# Allegro board pc049a_lemo_db_06.brd
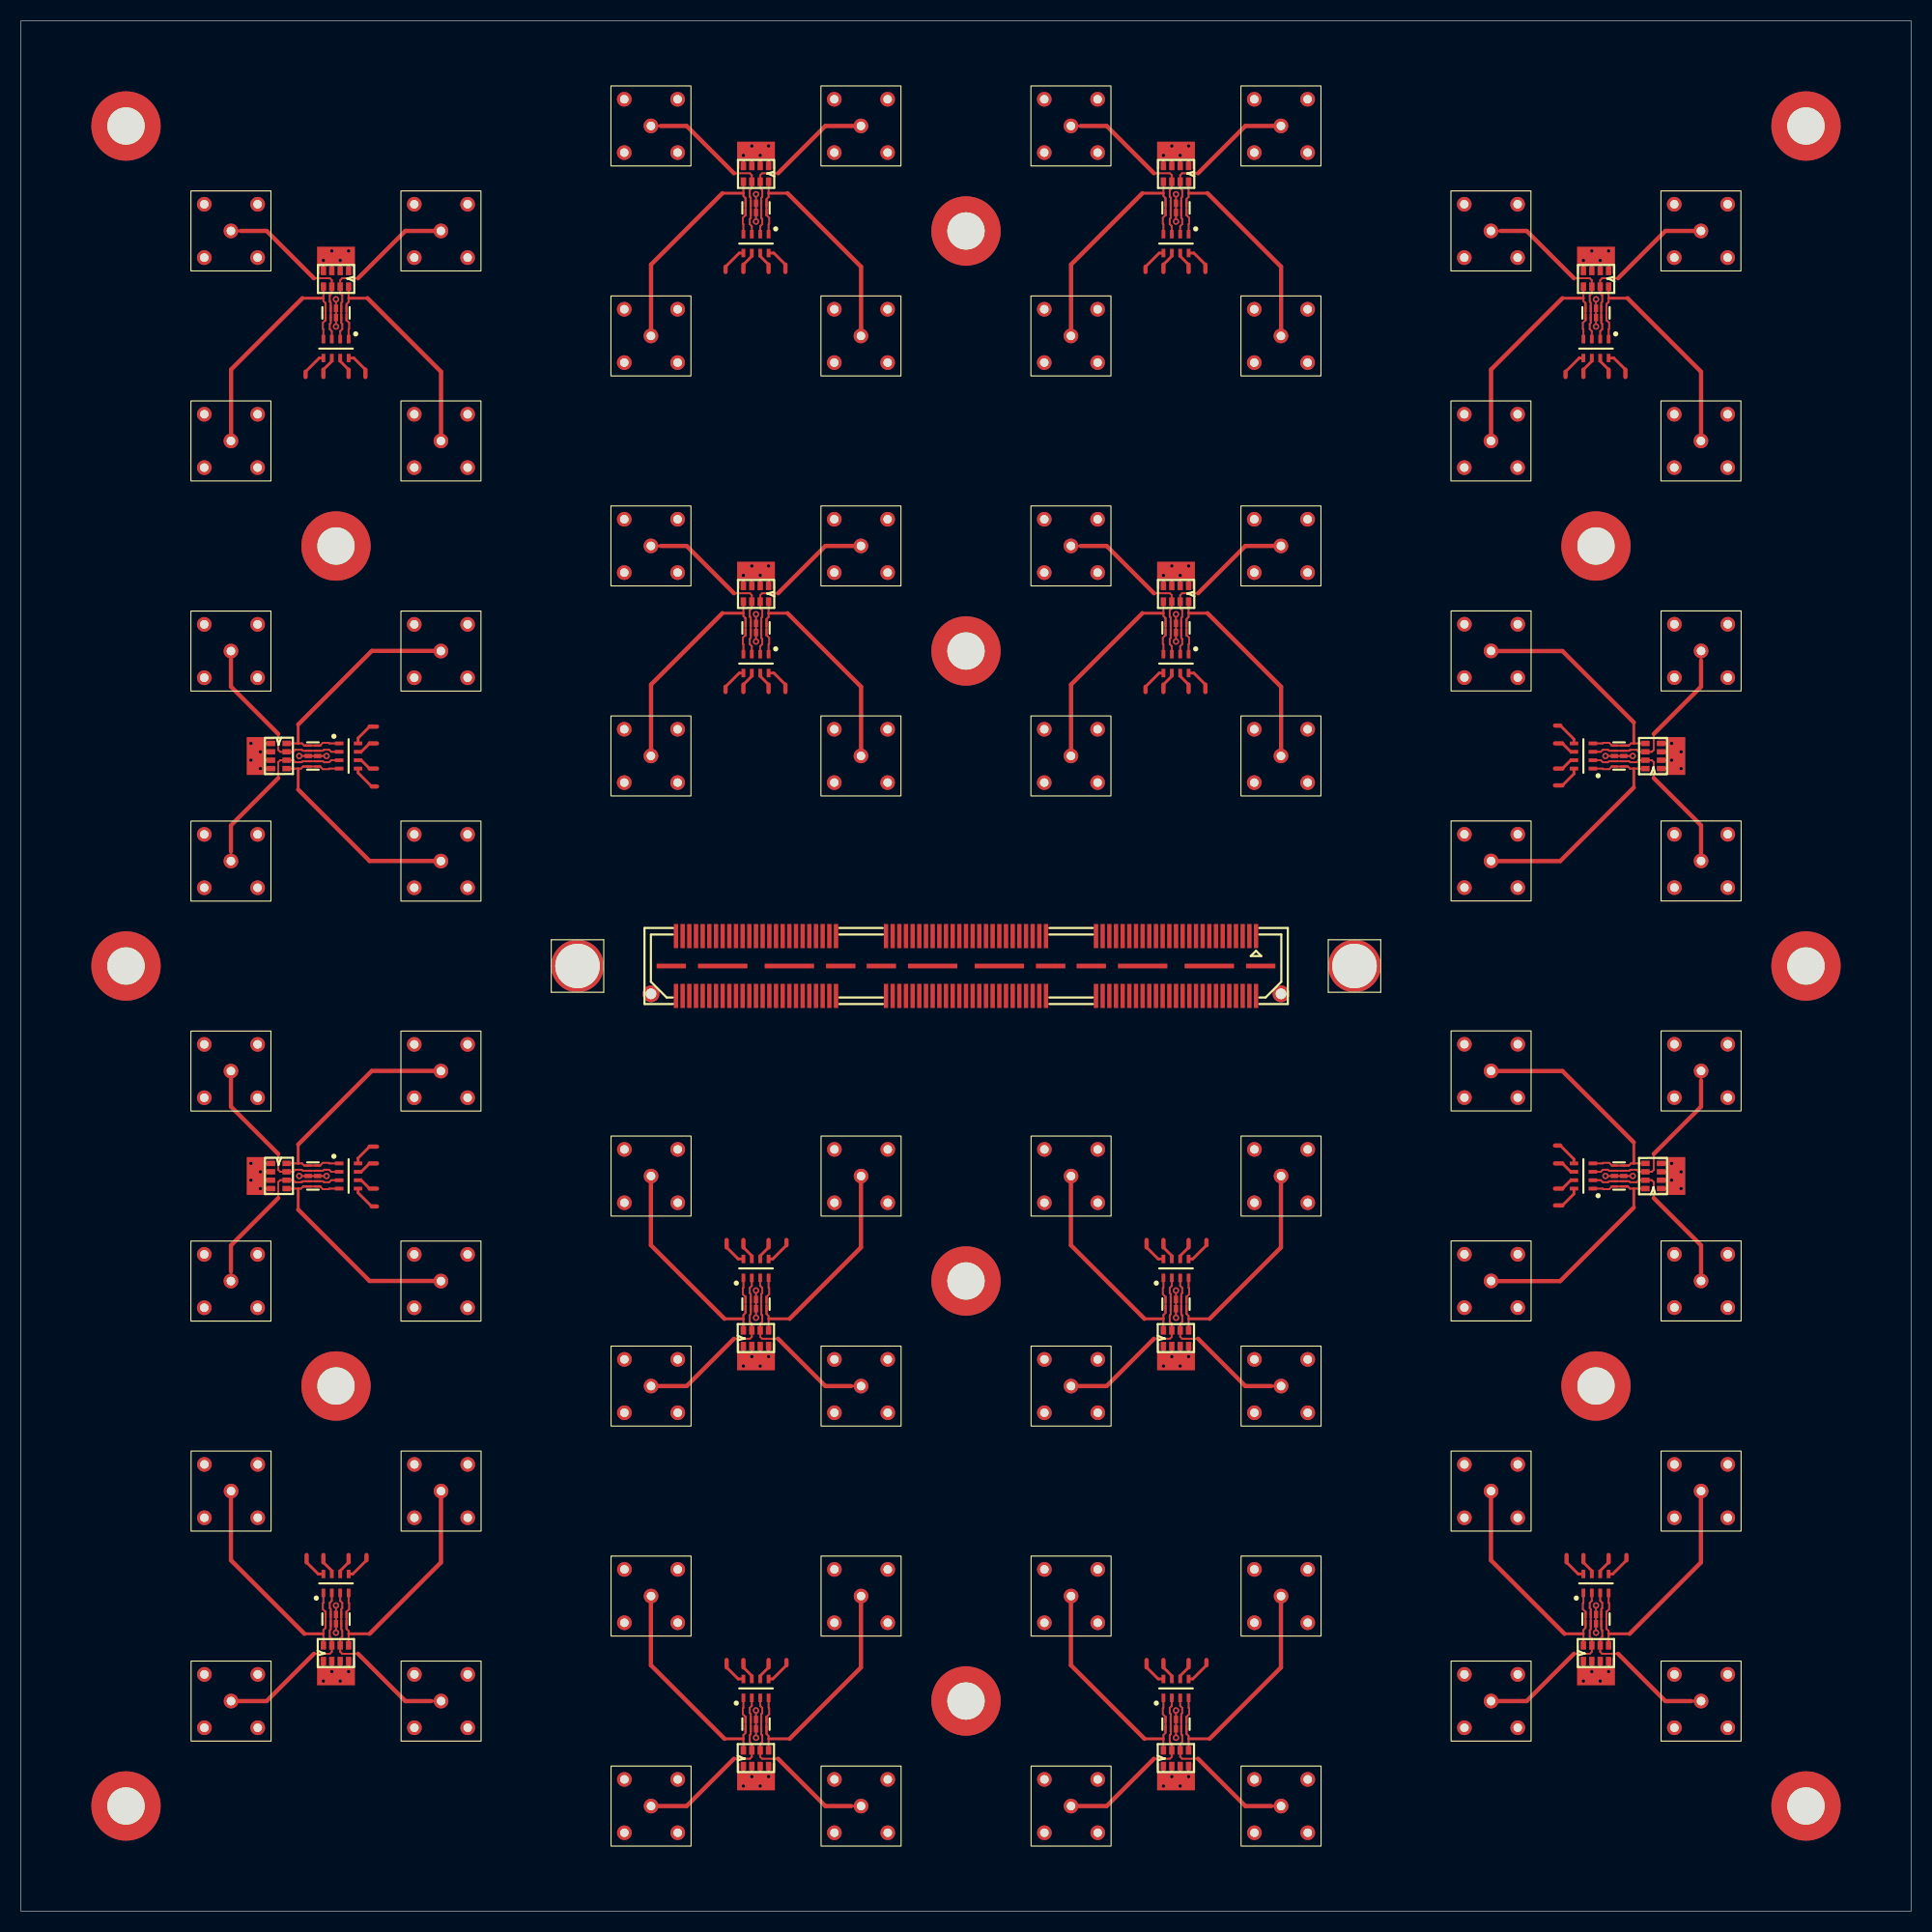
[diagram p0: board, top side]
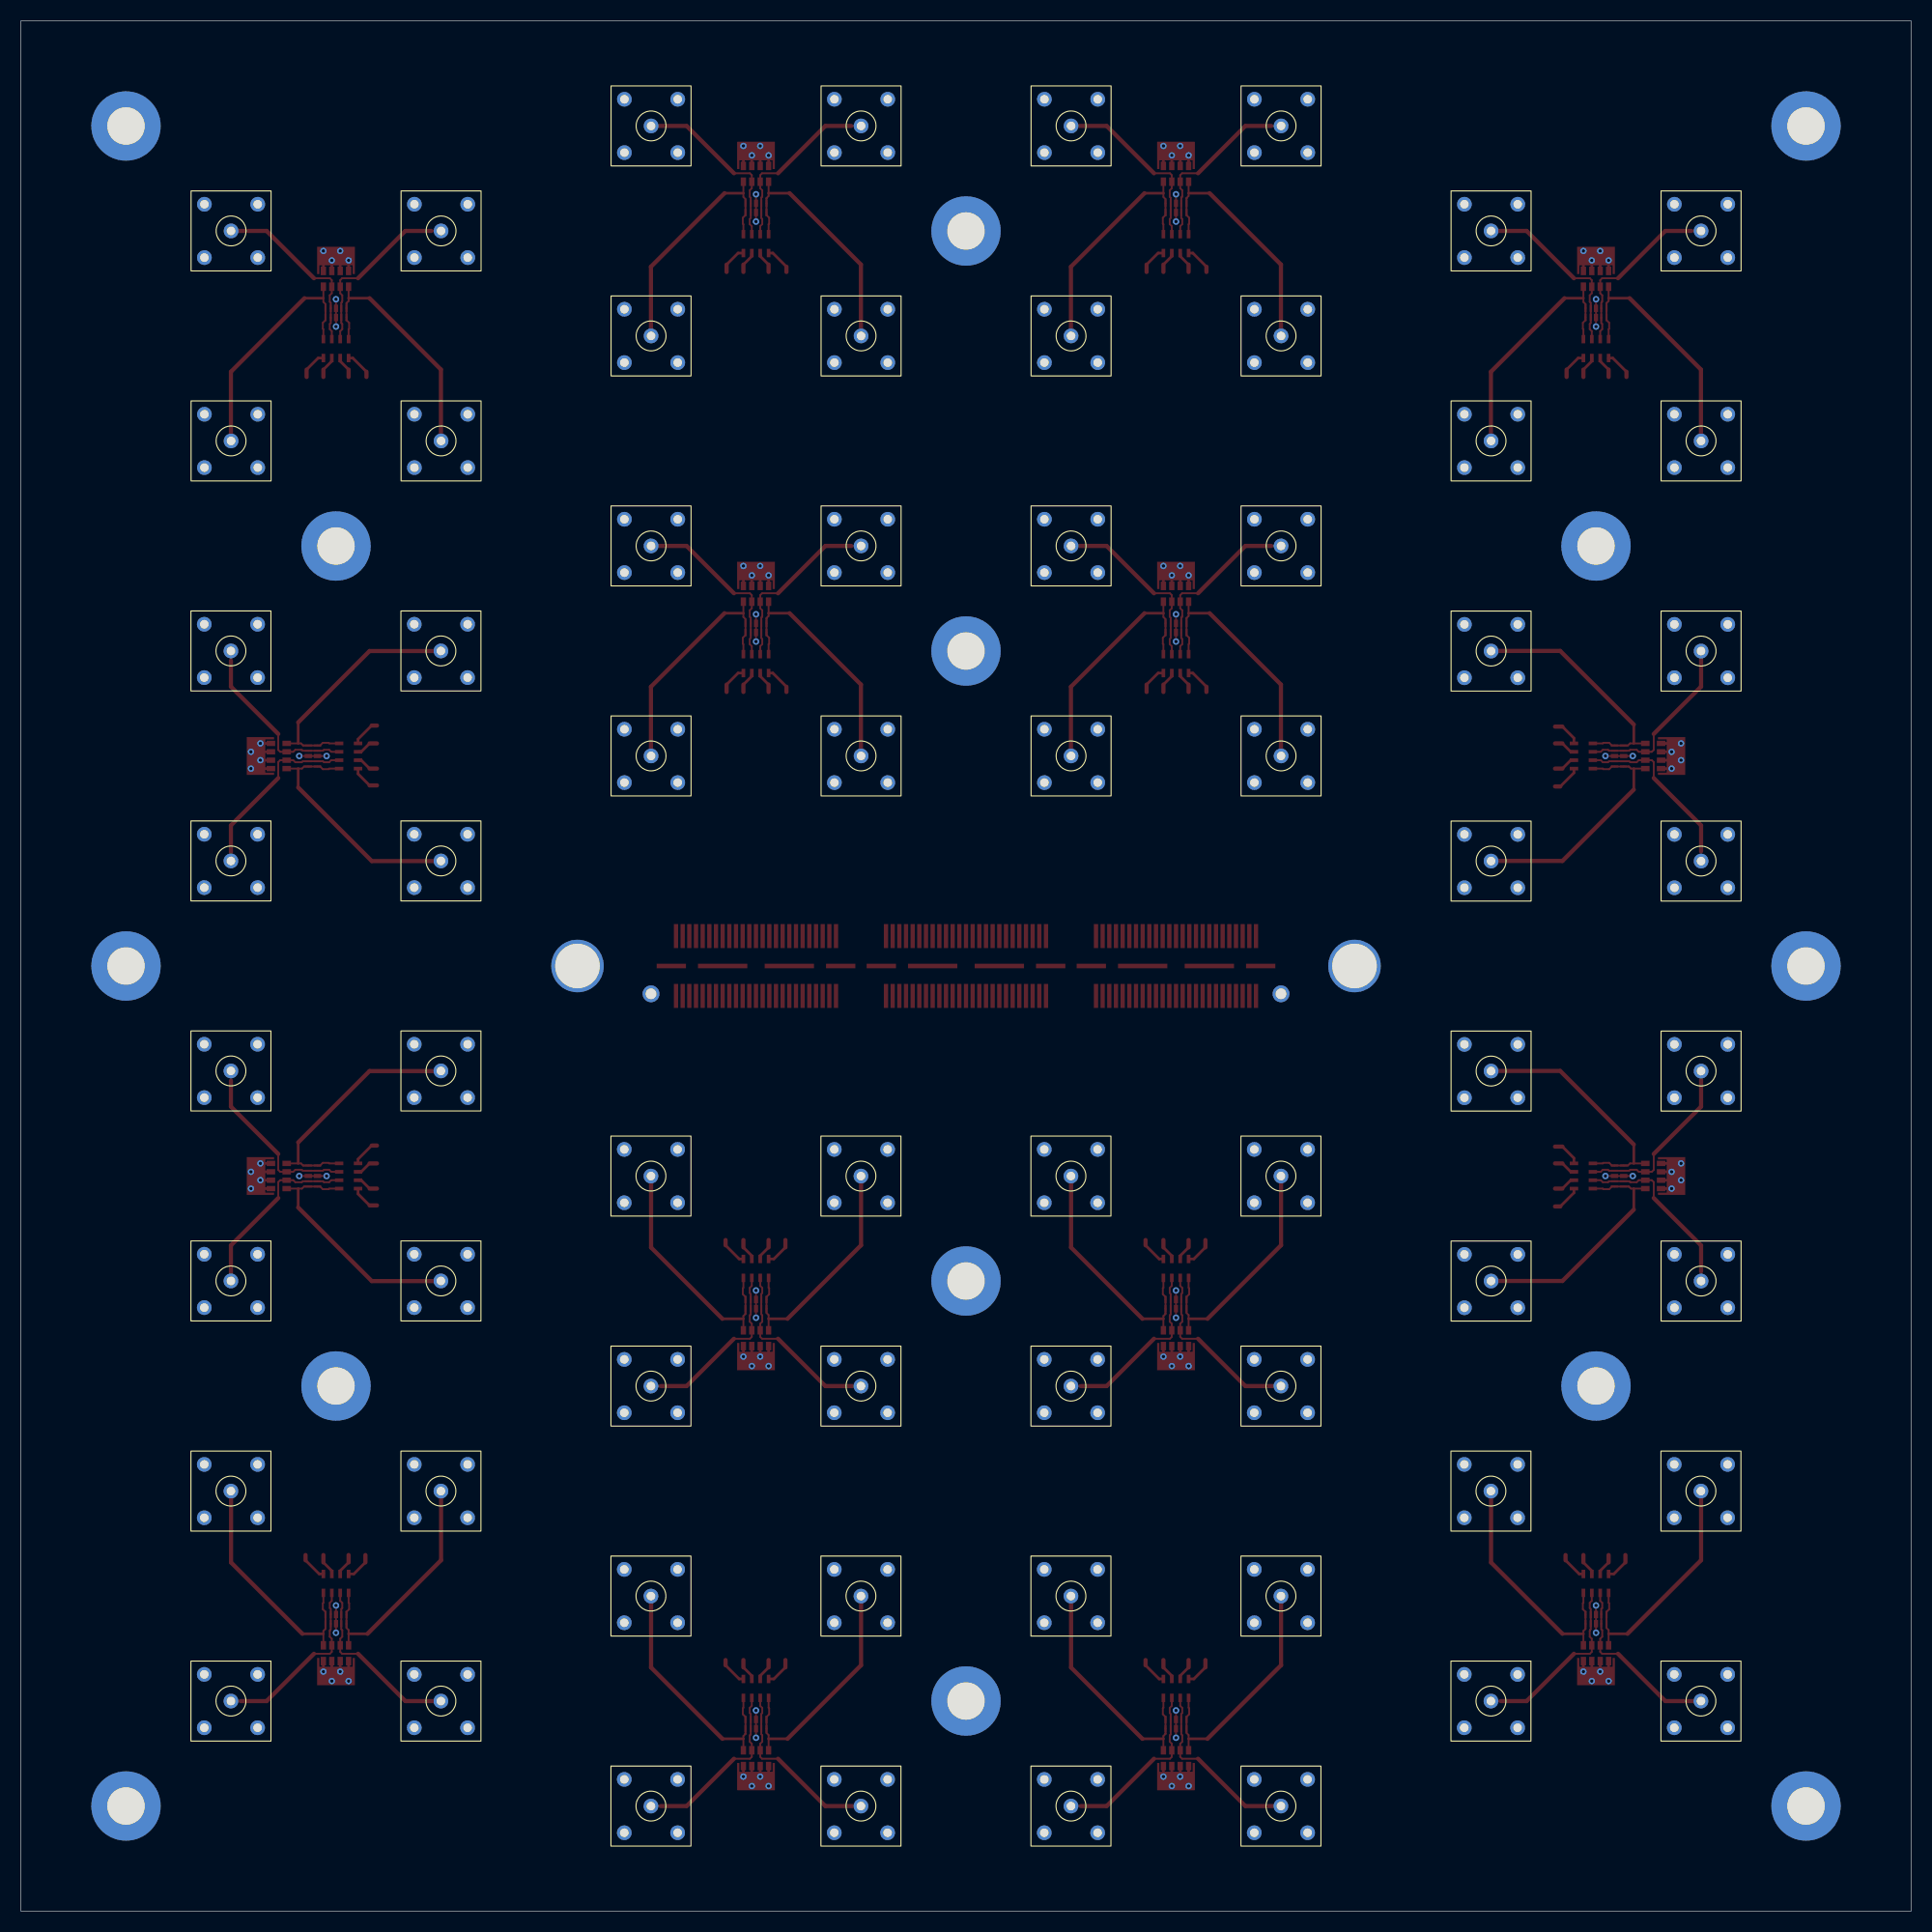
[diagram p1: board, bottom side, seen from below]

Outline 180 x 180 mm; copper layers: TOP, L2, L3, BOTTOM. Coordinates in mm from the lower left corner of the outline.
Outline path: 0,180 180,180 180,0 0,0 0,180

## Design rules (mm)
net group ANALOG_TO_MAROC: nets ANALOG_TO_MAROC<0> ANALOG_TO_MAROC<1> ANALOG_TO_MAROC<2> ANALOG_TO_MAROC<3> ANALOG_TO_MAROC<4> ANALOG_TO_MAROC<5> ANALOG_TO_MAROC<6> ANALOG_TO_MAROC<7> ANALOG_TO_MAROC<8> ANALOG_TO_MAROC<9> ANALOG_TO_MAROC<10> ANALOG_TO_MAROC<11> ANALOG_TO_MAROC<12> ANALOG_TO_MAROC<13> ANALOG_TO_MAROC<14> ANALOG_TO_MAROC<15> ANALOG_TO_MAROC<16> ANALOG_TO_MAROC<17> ANALOG_TO_MAROC<18> ANALOG_TO_MAROC<19> ANALOG_TO_MAROC<20> ANALOG_TO_MAROC<21> ANALOG_TO_MAROC<22> ANALOG_TO_MAROC<23> ANALOG_TO_MAROC<24> ANALOG_TO_MAROC<25> ANALOG_TO_MAROC<26> ANALOG_TO_MAROC<27> ANALOG_TO_MAROC<28> ANALOG_TO_MAROC<29> ANALOG_TO_MAROC<30> ANALOG_TO_MAROC<31> ANALOG_TO_MAROC<32> ANALOG_TO_MAROC<33> ANALOG_TO_MAROC<34> ANALOG_TO_MAROC<35> ANALOG_TO_MAROC<36> ANALOG_TO_MAROC<37> ANALOG_TO_MAROC<38> ANALOG_TO_MAROC<39> ANALOG_TO_MAROC<40> ANALOG_TO_MAROC<41> ANALOG_TO_MAROC<42> ANALOG_TO_MAROC<43> ANALOG_TO_MAROC<44> ANALOG_TO_MAROC<45> ANALOG_TO_MAROC<46> ANALOG_TO_MAROC<47> ANALOG_TO_MAROC<48> ANALOG_TO_MAROC<49> ANALOG_TO_MAROC<50> ANALOG_TO_MAROC<51> ANALOG_TO_MAROC<52> ANALOG_TO_MAROC<53> ANALOG_TO_MAROC<54> ANALOG_TO_MAROC<55> ANALOG_TO_MAROC<56> ANALOG_TO_MAROC<57> ANALOG_TO_MAROC<58> ANALOG_TO_MAROC<59> ANALOG_TO_MAROC<60> ANALOG_TO_MAROC<61> ANALOG_TO_MAROC<62> ANALOG_TO_MAROC<63>

## Placement (name value [footprint] x y rotation side)
CN1_1  100nF/16V  [CAPCAF80P160X320X110-8N]  31.2 70 0 top
CN1_2  100nF/16V  [CAPCAF80P160X320X110-8N]  30 31.2 90 top
CN1_3  100nF/16V  [CAPCAF80P160X320X110-8N]  70 61.2 90 top
CN1_4  100nF/16V  [CAPCAF80P160X320X110-8N]  70 21.2 90 top
CN1_5  100nF/16V  [CAPCAF80P160X320X110-8N]  110 21.2 90 top
CN1_6  100nF/16V  [CAPCAF80P160X320X110-8N]  110 61.2 90 top
CN1_7  100nF/16V  [CAPCAF80P160X320X110-8N]  148.8 70 180 top
CN1_8  100nF/16V  [CAPCAF80P160X320X110-8N]  150 31.2 90 top
CN1_9  100nF/16V  [CAPCAF80P160X320X110-8N]  148.8 110 180 top
CN1_10  100nF/16V  [CAPCAF80P160X320X110-8N]  150 148.8 270 top
CN1_11  100nF/16V  [CAPCAF80P160X320X110-8N]  110 158.8 270 top
CN1_12  100nF/16V  [CAPCAF80P160X320X110-8N]  110 118.8 270 top
CN1_13  100nF/16V  [CAPCAF80P160X320X110-8N]  70 158.8 270 top
CN1_14  100nF/16V  [CAPCAF80P160X320X110-8N]  70 118.8 270 top
CN1_15  100nF/16V  [CAPCAF80P160X320X110-8N]  31.2 110 0 top
CN1_16  100nF/16V  [CAPCAF80P160X320X110-8N]  30 148.8 270 top
D1_1  -  [DIO_LITTELFUSE_SP3010]  27.8 70 90 top
D1_2  -  [DIO_LITTELFUSE_SP3010]  30 27.8 180 top
D1_3  -  [DIO_LITTELFUSE_SP3010]  70 57.8 180 top
D1_4  -  [DIO_LITTELFUSE_SP3010]  70 17.8 180 top
D1_5  -  [DIO_LITTELFUSE_SP3010]  110 17.8 180 top
D1_6  -  [DIO_LITTELFUSE_SP3010]  110 57.8 180 top
D1_7  -  [DIO_LITTELFUSE_SP3010]  152.2 70 270 top
D1_8  -  [DIO_LITTELFUSE_SP3010]  150 27.8 180 top
D1_9  -  [DIO_LITTELFUSE_SP3010]  152.2 110 270 top
D1_10  -  [DIO_LITTELFUSE_SP3010]  150 152.2 0 top
D1_11  -  [DIO_LITTELFUSE_SP3010]  110 162.2 0 top
D1_12  -  [DIO_LITTELFUSE_SP3010]  110 122.2 0 top
D1_13  -  [DIO_LITTELFUSE_SP3010]  70 162.2 0 top
D1_14  -  [DIO_LITTELFUSE_SP3010]  70 122.2 0 top
D1_15  -  [DIO_LITTELFUSE_SP3010]  27.8 110 90 top
D1_16  -  [DIO_LITTELFUSE_SP3010]  30 152.2 0 top
J1  -  [CON150_QSSDA]  117.62 92.85 270 top
LK*  -  [unnamed#3]  53 90 0 top
LK*#2  -  [unnamed#3]  127 90 0 top
NOREF  -  [unnamed]  90 160 0 top
NOREF#2  -  [unnamed]  170 10 0 top
NOREF#3  -  [#2]  0 0 90 top
NOREF#4  -  [unnamed]  90 20 0 top
NOREF#5  -  [unnamed]  10 10 0 top
NOREF#6  -  [unnamed]  10 90 0 top
NOREF#7  -  [unnamed]  150 50 0 top
NOREF#8  -  [#2]  -130 -130 0 top
NOREF#9  -  [unnamed]  170 170 0 top
NOREF#10  -  [unnamed]  30 130 0 top
NOREF#11  -  [unnamed]  150 130 0 top
NOREF#12  -  [#2]  0 180 0 top
NOREF#13  -  [unnamed]  170 90 0 top
NOREF#14  -  [unnamed]  90 120 0 top
NOREF#15  -  [unnamed]  30 50 0 top
NOREF#16  -  [unnamed]  90 60 0 top
NOREF#17  -  [unnamed]  10 170 0 top
PX1_1  -  [PLEMOD80]  40 60 270 bottom
PX1_2  -  [PLEMOD80]  40 40 0 bottom
PX1_3  -  [PLEMOD80]  80 70 0 bottom
PX1_4  -  [PLEMOD80]  80 30 0 bottom
PX1_5  -  [PLEMOD80]  120 30 0 bottom
PX1_6  -  [PLEMOD80]  120 70 0 bottom
PX1_7  -  [PLEMOD80]  140 80 90 bottom
PX1_8  -  [PLEMOD80]  160 40 0 bottom
PX1_9  -  [PLEMOD80]  140 120 90 bottom
PX1_10  -  [PLEMOD80]  140 140 180 bottom
PX1_11  -  [PLEMOD80]  100 150 180 bottom
PX1_12  -  [PLEMOD80]  100 110 180 bottom
PX1_13  -  [PLEMOD80]  60 150 180 bottom
PX1_14  -  [PLEMOD80]  60 110 180 bottom
PX1_15  -  [PLEMOD80]  40 100 270 bottom
PX1_16  -  [PLEMOD80]  20 140 180 bottom
PX2_1  -  [PLEMOD80]  20 60 270 bottom
PX2_2  -  [PLEMOD80]  40 20 0 bottom
PX2_3  -  [PLEMOD80]  80 50 0 bottom
PX2_4  -  [PLEMOD80]  80 10 0 bottom
PX2_5  -  [PLEMOD80]  120 10 0 bottom
PX2_6  -  [PLEMOD80]  120 50 0 bottom
PX2_7  -  [PLEMOD80]  160 80 90 bottom
PX2_8  -  [PLEMOD80]  160 20 0 bottom
PX2_9  -  [PLEMOD80]  160 120 90 bottom
PX2_10  -  [PLEMOD80]  140 160 180 bottom
PX2_11  -  [PLEMOD80]  100 170 180 bottom
PX2_12  -  [PLEMOD80]  100 130 180 bottom
PX2_13  -  [PLEMOD80]  60 170 180 bottom
PX2_14  -  [PLEMOD80]  60 130 180 bottom
PX2_15  -  [PLEMOD80]  20 100 270 bottom
PX2_16  -  [PLEMOD80]  20 160 180 bottom
PX3_1  -  [PLEMOD80]  20 80 270 bottom
PX3_2  -  [PLEMOD80]  20 20 0 bottom
PX3_3  -  [PLEMOD80]  60 50 0 bottom
PX3_4  -  [PLEMOD80]  60 10 0 bottom
PX3_5  -  [PLEMOD80]  100 10 0 bottom
PX3_6  -  [PLEMOD80]  100 50 0 bottom
PX3_7  -  [PLEMOD80]  160 60 90 bottom
PX3_8  -  [PLEMOD80]  140 20 0 bottom
PX3_9  -  [PLEMOD80]  160 100 90 bottom
PX3_10  -  [PLEMOD80]  160 160 180 bottom
PX3_11  -  [PLEMOD80]  120 170 180 bottom
PX3_12  -  [PLEMOD80]  120 130 180 bottom
PX3_13  -  [PLEMOD80]  80 170 180 bottom
PX3_14  -  [PLEMOD80]  80 130 180 bottom
PX3_15  -  [PLEMOD80]  20 120 270 bottom
PX3_16  -  [PLEMOD80]  40 160 180 bottom
PX4_1  -  [PLEMOD80]  40 80 270 bottom
PX4_2  -  [PLEMOD80]  20 40 0 bottom
PX4_3  -  [PLEMOD80]  60 70 0 bottom
PX4_4  -  [PLEMOD80]  60 30 0 bottom
PX4_5  -  [PLEMOD80]  100 30 0 bottom
PX4_6  -  [PLEMOD80]  100 70 0 bottom
PX4_7  -  [PLEMOD80]  140 60 90 bottom
PX4_8  -  [PLEMOD80]  140 40 0 bottom
PX4_9  -  [PLEMOD80]  140 100 90 bottom
PX4_10  -  [PLEMOD80]  160 140 180 bottom
PX4_11  -  [PLEMOD80]  120 150 180 bottom
PX4_12  -  [PLEMOD80]  120 110 180 bottom
PX4_13  -  [PLEMOD80]  80 150 180 bottom
PX4_14  -  [PLEMOD80]  80 110 180 bottom
PX4_15  -  [PLEMOD80]  40 120 270 bottom
PX4_16  -  [PLEMOD80]  40 140 180 bottom
RZ1_1  180  [ARC241_SO8]  23.8 71.2 270 top
RZ1_2  180  [ARC241_SO8]  28.8 23.8 0 top
RZ1_3  180  [ARC241_SO8]  68.8 53.8 0 top
RZ1_4  180  [ARC241_SO8]  68.8 13.8 0 top
RZ1_5  180  [ARC241_SO8]  108.8 13.8 0 top
RZ1_6  180  [ARC241_SO8]  108.8 53.8 0 top
RZ1_7  180  [ARC241_SO8]  156.2 68.8 90 top
RZ1_8  180  [ARC241_SO8]  148.8 23.8 0 top
RZ1_9  180  [ARC241_SO8]  156.2 108.8 90 top
RZ1_10  180  [ARC241_SO8]  151.2 156.2 180 top
RZ1_11  180  [ARC241_SO8]  111.2 166.2 180 top
RZ1_12  180  [ARC241_SO8]  111.2 126.2 180 top
RZ1_13  180  [ARC241_SO8]  71.2 166.2 180 top
RZ1_14  180  [ARC241_SO8]  71.2 126.2 180 top
RZ1_15  180  [ARC241_SO8]  23.8 111.2 270 top
RZ1_16  180  [ARC241_SO8]  31.2 156.2 180 top

## Library data of the parts
CN1_1-CN1_16 = CAPN4I: part number: CAPN4I-100NF,16V,X7R,CKCA43
D1_1-D1_16 = TVS_DIODE_ARRAY_SP3010: part number: TVS_DIODE_ARRAY_SP3010_UDFN-SP3010-04UTG
J1 = CON150P: part number: CON150P-QSS75_01FDA
PX1_1-PX1_16 PX2_1-PX2_16 PX3_1-PX3_16 PX4_1-PX4_16 = COAX: part number: COAX-PLEMO00D
RZ1_1-RZ1_16 = R4ISMD: part number: R4ISMD_1206-180

## Footprints (pads in the part's own frame, mm; a bottom-side part is the same pattern mirrored in y, then rotated)
ARC241_SO8
  rect 0.508x0.813 smd: 1(0,0) 2(0.8,0) 3(1.6,0) 4(2.4,0) 5(2.4,1.505) 6(1.6,1.505) 7(0.8,1.505) 8(0,1.505)
CAPCAF80P160X320X110-8N
  rect 0.8x0.35 smd: 1(-0.9,1.2) 2(0.9,1.2) 3(-0.9,0.4) 4(0.9,0.4) 5(-0.9,-0.4) 6(0.9,-0.4) 7(-0.9,-1.2) 8(0.9,-1.2)
CON150_QSSDA
  round 1.6 hole 1.016: (5.5,2.38) (5.5,-57.62)
  rect 2.286x0.406 smd: 1(0,0) 2(5.7,0) 3(0,-0.635) 4(5.7,-0.635) 5(0,-1.27) 6(5.7,-1.27) 7(0,-1.905) 8(5.7,-1.905) 9(0,-2.54) 10(5.7,-2.54) 11(0,-3.175) 12(5.7,-3.175) 13(0,-3.81) 14(5.7,-3.81) 15(0,-4.445) 16(5.7,-4.445) 17(0,-5.08) 18(5.7,-5.08) 19(0,-5.715) 20(5.7,-5.715) 21(0,-6.35) 22(5.7,-6.35) 23(0,-6.985) 24(5.7,-6.985) 25(0,-7.62) 26(5.7,-7.62) 27(0,-8.255) 28(5.7,-8.255) 29(0,-8.89) 30(5.7,-8.89) 31(0,-9.525) 32(5.7,-9.525) 33(0,-10.16) 34(5.7,-10.16) 35(0,-10.795) 36(5.7,-10.795) 37(0,-11.43) 38(5.7,-11.43) 39(0,-12.065) 40(5.7,-12.065) 41(0,-12.7) 42(5.7,-12.7) 43(0,-13.335) 44(5.7,-13.335) 45(0,-13.97) 46(5.7,-13.97) 47(0,-14.605) 48(5.7,-14.605) 49(0,-15.24) 50(5.7,-15.24) 51(0,-20) 52(5.7,-20) 53(0,-20.635) 54(5.7,-20.635) 55(0,-21.27) 56(5.7,-21.27) 57(0,-21.905) 58(5.7,-21.905) 59(0,-22.54) 60(5.7,-22.54) 61(0,-23.175) 62(5.7,-23.175) 63(0,-23.81) 64(5.7,-23.81) 65(0,-24.445) 66(5.7,-24.445) 67(0,-25.08) 68(5.7,-25.08) 69(0,-25.715) 70(5.7,-25.715) 71(0,-26.35) 72(5.7,-26.35) 73(0,-26.985) 74(5.7,-26.985) 75(0,-27.62) 76(5.7,-27.62) 77(0,-28.255) 78(5.7,-28.255) 79(0,-28.89) 80(5.7,-28.89) 81(0,-29.525) 82(5.7,-29.525) 83(0,-30.16) 84(5.7,-30.16) 85(0,-30.795) 86(5.7,-30.795) 87(0,-31.43) 88(5.7,-31.43) 89(0,-32.065) 90(5.7,-32.065) 91(0,-32.7) 92(5.7,-32.7) 93(0,-33.335) 94(5.7,-33.335) 95(0,-33.97) 96(5.7,-33.97) 97(0,-34.605) 98(5.7,-34.605) 99(0,-35.24) 100(5.7,-35.24) 101(0,-40) 102(5.7,-40) 103(0,-40.635) 104(5.7,-40.635) 105(0,-41.27) 106(5.7,-41.27) 107(0,-41.905) 108(5.7,-41.905) 109(0,-42.54) 110(5.7,-42.54) 111(0,-43.175) 112(5.7,-43.175) 113(0,-43.81) 114(5.7,-43.81) 115(0,-44.445) 116(5.7,-44.445) 117(0,-45.08) 118(5.7,-45.08) 119(0,-45.715) 120(5.7,-45.715) 121(0,-46.35) 122(5.7,-46.35) 123(0,-46.985) 124(5.7,-46.985) 125(0,-47.62) 126(5.7,-47.62) 127(0,-48.255) 128(5.7,-48.255) 129(0,-48.89) 130(5.7,-48.89) 131(0,-49.525) 132(5.7,-49.525) 133(0,-50.16) 134(5.7,-50.16) 135(0,-50.795) 136(5.7,-50.795) 137(0,-51.43) 138(5.7,-51.43) 139(0,-52.065) 140(5.7,-52.065) 141(0,-52.7) 142(5.7,-52.7) 143(0,-53.335) 144(5.7,-53.335) 145(0,-53.97) 146(5.7,-53.97) 147(0,-54.605) 148(5.7,-54.605) 149(0,-55.24) 150(5.7,-55.24)
  rect 0.432x2.794 smd: 151(2.85,0.445) 154(2.85,-15.685) 155(2.85,-19.555) 158(2.85,-35.685) 159(2.85,-39.555) 162(2.85,-55.685)
  rect 0.432x4.699 smd: 152(2.85,-4.445) 153(2.85,-10.795) 156(2.85,-24.445) 157(2.85,-30.795) 160(2.85,-44.445) 161(2.85,-50.795)
DIO_LITTELFUSE_SP3010
  rect 0.2x0.7 smd: 1(1,0.437) 2(0.5,0.437) 4(-0.5,0.437) 5(-1,0.437) 6(-1,-0.438) 7(-0.5,-0.438) 9(0.5,-0.438) 10(1,-0.438)
  rect 0.4x0.7 smd: 3(0,0.437) 8(0,-0.438)
PLEMOD80
  round 1.397 hole 0.813: 1(0.006,0.007) 2(-2.534,-2.533) 3(2.546,-2.533) 4(2.546,2.547) 5(-2.534,2.547)
unnamed
  round 6.604 hole 3.556: 1(0,0)
unnamed#3
  round 5 hole 4.24 unplated: (0,0)

## Nets
AVDD: J1.147(A<146>) J1.148(A<147>) J1.149(A<148>) J1.150(A<149>)
GND_SIGNAL: D1_1.3(GND1) D1_1.8(GND2) D1_2.3(GND1) D1_2.8(GND2) D1_3.3(GND1) D1_3.8(GND2) D1_4.3(GND1) D1_4.8(GND2) D1_5.3(GND1) D1_5.8(GND2) D1_6.3(GND1) D1_6.8(GND2) D1_7.3(GND1) D1_7.8(GND2) D1_8.3(GND1) D1_8.8(GND2) D1_9.3(GND1) D1_9.8(GND2) D1_10.3(GND1) D1_10.8(GND2) D1_11.3(GND1) D1_11.8(GND2) D1_12.3(GND1) D1_12.8(GND2) D1_13.3(GND1) D1_13.8(GND2) D1_14.3(GND1) D1_14.8(GND2) D1_15.3(GND1) D1_15.8(GND2) D1_16.3(GND1) D1_16.8(GND2) J1.1(A<0>) J1.4(A<3>) J1.5(A<4>) J1.8(A<7>) J1.9(A<8>) J1.12(A<11>) J1.13(A<12>) J1.16(A<15>) J1.17(A<16>) J1.20(A<19>) J1.21(A<20>) J1.24(A<23>) J1.25(A<24>) J1.28(A<27>) J1.29(A<28>) J1.32(A<31>) J1.33(A<32>) J1.36(A<35>) J1.37(A<36>) J1.40(A<39>) J1.41(A<40>) J1.44(A<43>) J1.45(A<44>) J1.48(A<47>) J1.49(A<48>) J1.52(A<51>) J1.53(A<52>) J1.56(A<55>) J1.57(A<56>) J1.60(A<59>) J1.61(A<60>) J1.64(A<63>) J1.65(A<64>) J1.68(A<67>) J1.69(A<68>) J1.72(A<71>) J1.73(A<72>) J1.76(A<75>) J1.77(A<76>) J1.80(A<79>) J1.81(A<80>) J1.84(A<83>) J1.85(A<84>) J1.88(A<87>) J1.89(A<88>) J1.92(A<91>) J1.93(A<92>) J1.96(A<95>) J1.97(A<96>) J1.100(A<99>) J1.101(A<100>) J1.104(A<103>) J1.105(A<104>) J1.108(A<107>) J1.109(A<108>) J1.112(A<111>) J1.113(A<112>) J1.116(A<115>) J1.117(A<116>) J1.120(A<119>) J1.121(A<120>) J1.124(A<123>) J1.125(A<124>) J1.128(A<127>) J1.129(A<128>) J1.132(A<131>) J1.133(A<132>) J1.136(A<135>) J1.137(A<136>) J1.140(A<139>) J1.141(A<140>) J1.144(A<143>) J1.145(A<144>) J1.146(A<145>) PX1_1.2(B<0>) PX1_1.3(B<1>) PX1_1.4(B<2>) PX1_1.5(B<3>) PX1_2.2(B<0>) PX1_2.3(B<1>) PX1_2.4(B<2>) PX1_2.5(B<3>) PX1_3.2(B<0>) PX1_3.3(B<1>) PX1_3.4(B<2>) PX1_3.5(B<3>) PX1_4.2(B<0>) PX1_4.3(B<1>) PX1_4.4(B<2>) PX1_4.5(B<3>) PX1_5.2(B<0>) PX1_5.3(B<1>) PX1_5.4(B<2>) PX1_5.5(B<3>) PX1_6.2(B<0>) PX1_6.3(B<1>) PX1_6.4(B<2>) PX1_6.5(B<3>) PX1_7.2(B<0>) PX1_7.3(B<1>) PX1_7.4(B<2>) PX1_7.5(B<3>) PX1_8.2(B<0>) PX1_8.3(B<1>) PX1_8.4(B<2>) PX1_8.5(B<3>) PX1_9.2(B<0>) PX1_9.3(B<1>) PX1_9.4(B<2>) PX1_9.5(B<3>) PX1_10.2(B<0>) PX1_10.3(B<1>) PX1_10.4(B<2>) PX1_10.5(B<3>) PX1_11.2(B<0>) PX1_11.3(B<1>) PX1_11.4(B<2>) PX1_11.5(B<3>) PX1_12.2(B<0>) PX1_12.3(B<1>) PX1_12.4(B<2>) PX1_12.5(B<3>) PX1_13.2(B<0>) PX1_13.3(B<1>) PX1_13.4(B<2>) PX1_13.5(B<3>) PX1_14.2(B<0>) PX1_14.3(B<1>) PX1_14.4(B<2>) PX1_14.5(B<3>) PX1_15.2(B<0>) PX1_15.3(B<1>) PX1_15.4(B<2>) PX1_15.5(B<3>) PX1_16.2(B<0>) PX1_16.3(B<1>) PX1_16.4(B<2>) PX1_16.5(B<3>) PX2_1.2(B<0>) PX2_1.3(B<1>) PX2_1.4(B<2>) PX2_1.5(B<3>) PX2_2.2(B<0>) PX2_2.3(B<1>) PX2_2.4(B<2>) PX2_2.5(B<3>) PX2_3.2(B<0>) PX2_3.3(B<1>) PX2_3.4(B<2>) PX2_3.5(B<3>) PX2_4.2(B<0>) PX2_4.3(B<1>) PX2_4.4(B<2>) PX2_4.5(B<3>) PX2_5.2(B<0>) PX2_5.3(B<1>) PX2_5.4(B<2>) PX2_5.5(B<3>) PX2_6.2(B<0>) PX2_6.3(B<1>) PX2_6.4(B<2>) PX2_6.5(B<3>) PX2_7.2(B<0>) PX2_7.3(B<1>) PX2_7.4(B<2>) PX2_7.5(B<3>) PX2_8.2(B<0>) PX2_8.3(B<1>) PX2_8.4(B<2>) PX2_8.5(B<3>) PX2_9.2(B<0>) PX2_9.3(B<1>) PX2_9.4(B<2>) PX2_9.5(B<3>) PX2_10.2(B<0>) PX2_10.3(B<1>) PX2_10.4(B<2>) PX2_10.5(B<3>) PX2_11.2(B<0>) PX2_11.3(B<1>) PX2_11.4(B<2>) PX2_11.5(B<3>) PX2_12.2(B<0>) PX2_12.3(B<1>) PX2_12.4(B<2>) PX2_12.5(B<3>) PX2_13.2(B<0>) PX2_13.3(B<1>) PX2_13.4(B<2>) PX2_13.5(B<3>) PX2_14.2(B<0>) PX2_14.3(B<1>) PX2_14.4(B<2>) PX2_14.5(B<3>) PX2_15.2(B<0>) PX2_15.3(B<1>) PX2_15.4(B<2>) PX2_15.5(B<3>) PX2_16.2(B<0>) PX2_16.3(B<1>) PX2_16.4(B<2>) PX2_16.5(B<3>) PX3_1.2(B<0>) PX3_1.3(B<1>) PX3_1.4(B<2>) PX3_1.5(B<3>) PX3_2.2(B<0>) PX3_2.3(B<1>) PX3_2.4(B<2>) PX3_2.5(B<3>) PX3_3.2(B<0>) PX3_3.3(B<1>) PX3_3.4(B<2>) PX3_3.5(B<3>) PX3_4.2(B<0>) PX3_4.3(B<1>) PX3_4.4(B<2>) PX3_4.5(B<3>) PX3_5.2(B<0>) PX3_5.3(B<1>) PX3_5.4(B<2>) PX3_5.5(B<3>) PX3_6.2(B<0>) PX3_6.3(B<1>) PX3_6.4(B<2>) PX3_6.5(B<3>) PX3_7.2(B<0>) PX3_7.3(B<1>) PX3_7.4(B<2>) PX3_7.5(B<3>) PX3_8.2(B<0>) PX3_8.3(B<1>) PX3_8.4(B<2>) PX3_8.5(B<3>) PX3_9.2(B<0>) PX3_9.3(B<1>) PX3_9.4(B<2>) PX3_9.5(B<3>) PX3_10.2(B<0>) PX3_10.3(B<1>) PX3_10.4(B<2>) PX3_10.5(B<3>) PX3_11.2(B<0>) PX3_11.3(B<1>) PX3_11.4(B<2>) PX3_11.5(B<3>) PX3_12.2(B<0>) PX3_12.3(B<1>) PX3_12.4(B<2>) PX3_12.5(B<3>) PX3_13.2(B<0>) PX3_13.3(B<1>) PX3_13.4(B<2>) PX3_13.5(B<3>) PX3_14.2(B<0>) PX3_14.3(B<1>) PX3_14.4(B<2>) PX3_14.5(B<3>) PX3_15.2(B<0>) PX3_15.3(B<1>) PX3_15.4(B<2>) PX3_15.5(B<3>) PX3_16.2(B<0>) PX3_16.3(B<1>) PX3_16.4(B<2>) PX3_16.5(B<3>) PX4_1.2(B<0>) PX4_1.3(B<1>) PX4_1.4(B<2>) PX4_1.5(B<3>) PX4_2.2(B<0>) PX4_2.3(B<1>) PX4_2.4(B<2>) PX4_2.5(B<3>) PX4_3.2(B<0>) PX4_3.3(B<1>) PX4_3.4(B<2>) PX4_3.5(B<3>) PX4_4.2(B<0>) PX4_4.3(B<1>) PX4_4.4(B<2>) PX4_4.5(B<3>) PX4_5.2(B<0>) PX4_5.3(B<1>) PX4_5.4(B<2>) PX4_5.5(B<3>) PX4_6.2(B<0>) PX4_6.3(B<1>) PX4_6.4(B<2>) PX4_6.5(B<3>) PX4_7.2(B<0>) PX4_7.3(B<1>) PX4_7.4(B<2>) PX4_7.5(B<3>) PX4_8.2(B<0>) PX4_8.3(B<1>) PX4_8.4(B<2>) PX4_8.5(B<3>) PX4_9.2(B<0>) PX4_9.3(B<1>) PX4_9.4(B<2>) PX4_9.5(B<3>) PX4_10.2(B<0>) PX4_10.3(B<1>) PX4_10.4(B<2>) PX4_10.5(B<3>) PX4_11.2(B<0>) PX4_11.3(B<1>) PX4_11.4(B<2>) PX4_11.5(B<3>) PX4_12.2(B<0>) PX4_12.3(B<1>) PX4_12.4(B<2>) PX4_12.5(B<3>) PX4_13.2(B<0>) PX4_13.3(B<1>) PX4_13.4(B<2>) PX4_13.5(B<3>) PX4_14.2(B<0>) PX4_14.3(B<1>) PX4_14.4(B<2>) PX4_14.5(B<3>) PX4_15.2(B<0>) PX4_15.3(B<1>) PX4_15.4(B<2>) PX4_15.5(B<3>) PX4_16.2(B<0>) PX4_16.3(B<1>) PX4_16.4(B<2>) PX4_16.5(B<3>) RZ1_1.1(A<0>) RZ1_1.2(A<0>) RZ1_1.3(A<0>) RZ1_1.4(A<0>) RZ1_2.1(A<0>) RZ1_2.2(A<0>) RZ1_2.3(A<0>) RZ1_2.4(A<0>) RZ1_3.1(A<0>) RZ1_3.2(A<0>) RZ1_3.3(A<0>) RZ1_3.4(A<0>) RZ1_4.1(A<0>) RZ1_4.2(A<0>) RZ1_4.3(A<0>) RZ1_4.4(A<0>) RZ1_5.1(A<0>) RZ1_5.2(A<0>) RZ1_5.3(A<0>) RZ1_5.4(A<0>) RZ1_6.1(A<0>) RZ1_6.2(A<0>) RZ1_6.3(A<0>) RZ1_6.4(A<0>) RZ1_7.1(A<0>) RZ1_7.2(A<0>) RZ1_7.3(A<0>) RZ1_7.4(A<0>) RZ1_8.1(A<0>) RZ1_8.2(A<0>) RZ1_8.3(A<0>) RZ1_8.4(A<0>) RZ1_9.1(A<0>) RZ1_9.2(A<0>) RZ1_9.3(A<0>) RZ1_9.4(A<0>) RZ1_10.1(A<0>) RZ1_10.2(A<0>) RZ1_10.3(A<0>) RZ1_10.4(A<0>) RZ1_11.1(A<0>) RZ1_11.2(A<0>) RZ1_11.3(A<0>) RZ1_11.4(A<0>) RZ1_12.1(A<0>) RZ1_12.2(A<0>) RZ1_12.3(A<0>) RZ1_12.4(A<0>) RZ1_13.1(A<0>) RZ1_13.2(A<0>) RZ1_13.3(A<0>) RZ1_13.4(A<0>) RZ1_14.1(A<0>) RZ1_14.2(A<0>) RZ1_14.3(A<0>) RZ1_14.4(A<0>) RZ1_15.1(A<0>) RZ1_15.2(A<0>) RZ1_15.3(A<0>) RZ1_15.4(A<0>) RZ1_16.1(A<0>) RZ1_16.2(A<0>) RZ1_16.3(A<0>) RZ1_16.4(A<0>)
ANALOG_TO_MAROC<0>: CN1_7.8(B<0>) J1.2(A<1>)
ANALOG_TO_MAROC<1>: CN1_9.2(B<0>) J1.3(A<2>)
ANALOG_TO_MAROC<2>: CN1_7.6(B<0>) J1.6(A<5>)
ANALOG_TO_MAROC<3>: CN1_9.4(B<0>) J1.7(A<6>)
ANALOG_TO_MAROC<4>: CN1_7.4(B<0>) J1.10(A<9>)
ANALOG_TO_MAROC<5>: CN1_9.6(B<0>) J1.11(A<10>)
ANALOG_TO_MAROC<6>: CN1_7.2(B<0>) J1.14(A<13>)
ANALOG_TO_MAROC<7>: CN1_9.8(B<0>) J1.15(A<14>)
ANALOG_TO_MAROC<8>: CN1_8.8(B<0>) J1.18(A<17>)
ANALOG_TO_MAROC<9>: CN1_10.2(B<0>) J1.19(A<18>)
ANALOG_TO_MAROC<10>: CN1_8.6(B<0>) J1.22(A<21>)
ANALOG_TO_MAROC<11>: CN1_10.4(B<0>) J1.23(A<22>)
ANALOG_TO_MAROC<12>: CN1_8.4(B<0>) J1.26(A<25>)
ANALOG_TO_MAROC<13>: CN1_10.6(B<0>) J1.27(A<26>)
ANALOG_TO_MAROC<14>: CN1_8.2(B<0>) J1.30(A<29>)
ANALOG_TO_MAROC<15>: CN1_10.8(B<0>) J1.31(A<30>)
ANALOG_TO_MAROC<16>: CN1_6.8(B<0>) J1.34(A<33>)
ANALOG_TO_MAROC<17>: CN1_12.2(B<0>) J1.35(A<34>)
ANALOG_TO_MAROC<18>: CN1_6.6(B<0>) J1.38(A<37>)
ANALOG_TO_MAROC<19>: CN1_12.4(B<0>) J1.39(A<38>)
ANALOG_TO_MAROC<20>: CN1_6.4(B<0>) J1.42(A<41>)
ANALOG_TO_MAROC<21>: CN1_12.6(B<0>) J1.43(A<42>)
ANALOG_TO_MAROC<22>: CN1_6.2(B<0>) J1.46(A<45>)
ANALOG_TO_MAROC<23>: CN1_12.8(B<0>) J1.47(A<46>)
ANALOG_TO_MAROC<24>: CN1_5.8(B<0>) J1.50(A<49>)
ANALOG_TO_MAROC<25>: CN1_11.2(B<0>) J1.51(A<50>)
ANALOG_TO_MAROC<26>: CN1_5.6(B<0>) J1.54(A<53>)
ANALOG_TO_MAROC<27>: CN1_11.4(B<0>) J1.55(A<54>)
ANALOG_TO_MAROC<28>: CN1_5.4(B<0>) J1.58(A<57>)
ANALOG_TO_MAROC<29>: CN1_11.6(B<0>) J1.59(A<58>)
ANALOG_TO_MAROC<30>: CN1_5.2(B<0>) J1.62(A<61>)
ANALOG_TO_MAROC<31>: CN1_11.8(B<0>) J1.63(A<62>)
ANALOG_TO_MAROC<32>: CN1_4.8(B<0>) J1.66(A<65>)
ANALOG_TO_MAROC<33>: CN1_13.2(B<0>) J1.67(A<66>)
ANALOG_TO_MAROC<34>: CN1_4.6(B<0>) J1.70(A<69>)
ANALOG_TO_MAROC<35>: CN1_13.4(B<0>) J1.71(A<70>)
ANALOG_TO_MAROC<36>: CN1_4.4(B<0>) J1.74(A<73>)
ANALOG_TO_MAROC<37>: CN1_13.6(B<0>) J1.75(A<74>)
ANALOG_TO_MAROC<38>: CN1_4.2(B<0>) J1.78(A<77>)
ANALOG_TO_MAROC<39>: CN1_13.8(B<0>) J1.79(A<78>)
ANALOG_TO_MAROC<40>: CN1_3.8(B<0>) J1.82(A<81>)
ANALOG_TO_MAROC<41>: CN1_14.2(B<0>) J1.83(A<82>)
ANALOG_TO_MAROC<42>: CN1_3.6(B<0>) J1.86(A<85>)
ANALOG_TO_MAROC<43>: CN1_14.4(B<0>) J1.87(A<86>)
ANALOG_TO_MAROC<44>: CN1_3.4(B<0>) J1.90(A<89>)
ANALOG_TO_MAROC<45>: CN1_14.6(B<0>) J1.91(A<90>)
ANALOG_TO_MAROC<46>: CN1_3.2(B<0>) J1.94(A<93>)
ANALOG_TO_MAROC<47>: CN1_14.8(B<0>) J1.95(A<94>)
ANALOG_TO_MAROC<48>: CN1_2.8(B<0>) J1.98(A<97>)
ANALOG_TO_MAROC<49>: CN1_16.2(B<0>) J1.99(A<98>)
ANALOG_TO_MAROC<50>: CN1_2.6(B<0>) J1.102(A<101>)
ANALOG_TO_MAROC<51>: CN1_16.4(B<0>) J1.103(A<102>)
ANALOG_TO_MAROC<52>: CN1_2.4(B<0>) J1.106(A<105>)
ANALOG_TO_MAROC<53>: CN1_16.6(B<0>) J1.107(A<106>)
ANALOG_TO_MAROC<54>: CN1_2.2(B<0>) J1.110(A<109>)
ANALOG_TO_MAROC<55>: CN1_16.8(B<0>) J1.111(A<110>)
ANALOG_TO_MAROC<56>: CN1_1.8(B<0>) J1.114(A<113>)
ANALOG_TO_MAROC<57>: CN1_15.2(B<0>) J1.115(A<114>)
ANALOG_TO_MAROC<58>: CN1_1.6(B<0>) J1.118(A<117>)
ANALOG_TO_MAROC<59>: CN1_15.4(B<0>) J1.119(A<118>)
ANALOG_TO_MAROC<60>: CN1_1.4(B<0>) J1.122(A<121>)
ANALOG_TO_MAROC<61>: CN1_15.6(B<0>) J1.123(A<122>)
ANALOG_TO_MAROC<62>: CN1_1.2(B<0>) J1.126(A<125>)
ANALOG_TO_MAROC<63>: CN1_15.8(B<0>) J1.127(A<126>)
DBOARD_MISO: J1.131(A<130>)
DBOARD_MISO*: J1.135(A<134>)
DBOARD_MOSI: J1.138(A<137>)
DBOARD_MOSI*: J1.142(A<141>)
DBOARD_SCLK: J1.130(A<129>)
DBOARD_SCLK*: J1.134(A<133>)
DBOARD_SSN: J1.139(A<138>)
DBOARD_SSN*: J1.143(A<142>)
P1: J1.151 J1.152 J1.153 J1.154
P2: J1.155 J1.156 J1.157 J1.158
P3: J1.159 J1.160 J1.161 J1.162
UNNAMED_1_CAPN4I_I10_A_1: CN1_1.1(A<0>) D1_1.1(A1) D1_1.10(B1) PX4_1.1(A) RZ1_1.8(B<0>)
UNNAMED_1_CAPN4I_I10_A_1_1: CN1_1.3(A<0>) D1_1.2(A2) D1_1.9(B2) PX3_1.1(A) RZ1_1.7(B<0>)
UNNAMED_1_CAPN4I_I10_A_1_2: CN1_2.3(A<0>) D1_2.2(A2) D1_2.9(B2) PX3_2.1(A) RZ1_2.7(B<0>)
UNNAMED_1_CAPN4I_I10_A_1_3: CN1_3.3(A<0>) D1_3.2(A2) D1_3.9(B2) PX3_3.1(A) RZ1_3.7(B<0>)
UNNAMED_1_CAPN4I_I10_A_1_4: CN1_4.3(A<0>) D1_4.2(A2) D1_4.9(B2) PX3_4.1(A) RZ1_4.7(B<0>)
UNNAMED_1_CAPN4I_I10_A_1_5: CN1_5.3(A<0>) D1_5.2(A2) D1_5.9(B2) PX3_5.1(A) RZ1_5.7(B<0>)
UNNAMED_1_CAPN4I_I10_A_1_6: CN1_6.3(A<0>) D1_6.2(A2) D1_6.9(B2) PX3_6.1(A) RZ1_6.7(B<0>)
UNNAMED_1_CAPN4I_I10_A_1_7: CN1_7.3(A<0>) D1_7.2(A2) D1_7.9(B2) PX3_7.1(A) RZ1_7.7(B<0>)
UNNAMED_1_CAPN4I_I10_A_1_8: CN1_8.3(A<0>) D1_8.2(A2) D1_8.9(B2) PX3_8.1(A) RZ1_8.7(B<0>)
UNNAMED_1_CAPN4I_I10_A_1_9: CN1_9.3(A<0>) D1_9.2(A2) D1_9.9(B2) PX3_9.1(A) RZ1_9.7(B<0>)
UNNAMED_1_CAPN4I_I10_A_1_10: CN1_10.3(A<0>) D1_10.2(A2) D1_10.9(B2) PX3_10.1(A) RZ1_10.7(B<0>)
UNNAMED_1_CAPN4I_I10_A_1_11: CN1_11.3(A<0>) D1_11.2(A2) D1_11.9(B2) PX3_11.1(A) RZ1_11.7(B<0>)
UNNAMED_1_CAPN4I_I10_A_1_12: CN1_12.3(A<0>) D1_12.2(A2) D1_12.9(B2) PX3_12.1(A) RZ1_12.7(B<0>)
UNNAMED_1_CAPN4I_I10_A_1_13: CN1_13.3(A<0>) D1_13.2(A2) D1_13.9(B2) PX3_13.1(A) RZ1_13.7(B<0>)
UNNAMED_1_CAPN4I_I10_A_1_14: CN1_14.3(A<0>) D1_14.2(A2) D1_14.9(B2) PX3_14.1(A) RZ1_14.7(B<0>)
UNNAMED_1_CAPN4I_I10_A_1_15: CN1_15.3(A<0>) D1_15.2(A2) D1_15.9(B2) PX3_15.1(A) RZ1_15.7(B<0>)
UNNAMED_1_CAPN4I_I10_A_1_16: CN1_16.3(A<0>) D1_16.2(A2) D1_16.9(B2) PX3_16.1(A) RZ1_16.7(B<0>)
UNNAMED_1_CAPN4I_I10_A_2: CN1_2.1(A<0>) D1_2.1(A1) D1_2.10(B1) PX4_2.1(A) RZ1_2.8(B<0>)
UNNAMED_1_CAPN4I_I10_A_2_1: CN1_1.5(A<0>) D1_1.4(A3) D1_1.7(B3) PX2_1.1(A) RZ1_1.6(B<0>)
UNNAMED_1_CAPN4I_I10_A_2_2: CN1_2.5(A<0>) D1_2.4(A3) D1_2.7(B3) PX2_2.1(A) RZ1_2.6(B<0>)
UNNAMED_1_CAPN4I_I10_A_2_3: CN1_3.5(A<0>) D1_3.4(A3) D1_3.7(B3) PX2_3.1(A) RZ1_3.6(B<0>)
UNNAMED_1_CAPN4I_I10_A_2_4: CN1_4.5(A<0>) D1_4.4(A3) D1_4.7(B3) PX2_4.1(A) RZ1_4.6(B<0>)
UNNAMED_1_CAPN4I_I10_A_2_5: CN1_5.5(A<0>) D1_5.4(A3) D1_5.7(B3) PX2_5.1(A) RZ1_5.6(B<0>)
UNNAMED_1_CAPN4I_I10_A_2_6: CN1_6.5(A<0>) D1_6.4(A3) D1_6.7(B3) PX2_6.1(A) RZ1_6.6(B<0>)
UNNAMED_1_CAPN4I_I10_A_2_7: CN1_7.5(A<0>) D1_7.4(A3) D1_7.7(B3) PX2_7.1(A) RZ1_7.6(B<0>)
UNNAMED_1_CAPN4I_I10_A_2_8: CN1_8.5(A<0>) D1_8.4(A3) D1_8.7(B3) PX2_8.1(A) RZ1_8.6(B<0>)
UNNAMED_1_CAPN4I_I10_A_2_9: CN1_9.5(A<0>) D1_9.4(A3) D1_9.7(B3) PX2_9.1(A) RZ1_9.6(B<0>)
UNNAMED_1_CAPN4I_I10_A_2_10: CN1_10.5(A<0>) D1_10.4(A3) D1_10.7(B3) PX2_10.1(A) RZ1_10.6(B<0>)
UNNAMED_1_CAPN4I_I10_A_2_11: CN1_11.5(A<0>) D1_11.4(A3) D1_11.7(B3) PX2_11.1(A) RZ1_11.6(B<0>)
UNNAMED_1_CAPN4I_I10_A_2_12: CN1_12.5(A<0>) D1_12.4(A3) D1_12.7(B3) PX2_12.1(A) RZ1_12.6(B<0>)
UNNAMED_1_CAPN4I_I10_A_2_13: CN1_13.5(A<0>) D1_13.4(A3) D1_13.7(B3) PX2_13.1(A) RZ1_13.6(B<0>)
UNNAMED_1_CAPN4I_I10_A_2_14: CN1_14.5(A<0>) D1_14.4(A3) D1_14.7(B3) PX2_14.1(A) RZ1_14.6(B<0>)
UNNAMED_1_CAPN4I_I10_A_2_15: CN1_15.5(A<0>) D1_15.4(A3) D1_15.7(B3) PX2_15.1(A) RZ1_15.6(B<0>)
UNNAMED_1_CAPN4I_I10_A_2_16: CN1_16.5(A<0>) D1_16.4(A3) D1_16.7(B3) PX2_16.1(A) RZ1_16.6(B<0>)
UNNAMED_1_CAPN4I_I10_A_3: CN1_3.1(A<0>) D1_3.1(A1) D1_3.10(B1) PX4_3.1(A) RZ1_3.8(B<0>)
UNNAMED_1_CAPN4I_I10_A_3_1: CN1_1.7(A<0>) D1_1.5(A4) D1_1.6(B4) PX1_1.1(A) RZ1_1.5(B<0>)
UNNAMED_1_CAPN4I_I10_A_3_2: CN1_2.7(A<0>) D1_2.5(A4) D1_2.6(B4) PX1_2.1(A) RZ1_2.5(B<0>)
UNNAMED_1_CAPN4I_I10_A_3_3: CN1_3.7(A<0>) D1_3.5(A4) D1_3.6(B4) PX1_3.1(A) RZ1_3.5(B<0>)
UNNAMED_1_CAPN4I_I10_A_3_4: CN1_4.7(A<0>) D1_4.5(A4) D1_4.6(B4) PX1_4.1(A) RZ1_4.5(B<0>)
UNNAMED_1_CAPN4I_I10_A_3_5: CN1_5.7(A<0>) D1_5.5(A4) D1_5.6(B4) PX1_5.1(A) RZ1_5.5(B<0>)
UNNAMED_1_CAPN4I_I10_A_3_6: CN1_6.7(A<0>) D1_6.5(A4) D1_6.6(B4) PX1_6.1(A) RZ1_6.5(B<0>)
UNNAMED_1_CAPN4I_I10_A_3_7: CN1_7.7(A<0>) D1_7.5(A4) D1_7.6(B4) PX1_7.1(A) RZ1_7.5(B<0>)
UNNAMED_1_CAPN4I_I10_A_3_8: CN1_8.7(A<0>) D1_8.5(A4) D1_8.6(B4) PX1_8.1(A) RZ1_8.5(B<0>)
UNNAMED_1_CAPN4I_I10_A_3_9: CN1_9.7(A<0>) D1_9.5(A4) D1_9.6(B4) PX1_9.1(A) RZ1_9.5(B<0>)
UNNAMED_1_CAPN4I_I10_A_3_10: CN1_10.7(A<0>) D1_10.5(A4) D1_10.6(B4) PX1_10.1(A) RZ1_10.5(B<0>)
UNNAMED_1_CAPN4I_I10_A_3_11: CN1_11.7(A<0>) D1_11.5(A4) D1_11.6(B4) PX1_11.1(A) RZ1_11.5(B<0>)
UNNAMED_1_CAPN4I_I10_A_3_12: CN1_12.7(A<0>) D1_12.5(A4) D1_12.6(B4) PX1_12.1(A) RZ1_12.5(B<0>)
UNNAMED_1_CAPN4I_I10_A_3_13: CN1_13.7(A<0>) D1_13.5(A4) D1_13.6(B4) PX1_13.1(A) RZ1_13.5(B<0>)
UNNAMED_1_CAPN4I_I10_A_3_14: CN1_14.7(A<0>) D1_14.5(A4) D1_14.6(B4) PX1_14.1(A) RZ1_14.5(B<0>)
UNNAMED_1_CAPN4I_I10_A_3_15: CN1_15.7(A<0>) D1_15.5(A4) D1_15.6(B4) PX1_15.1(A) RZ1_15.5(B<0>)
UNNAMED_1_CAPN4I_I10_A_3_16: CN1_16.7(A<0>) D1_16.5(A4) D1_16.6(B4) PX1_16.1(A) RZ1_16.5(B<0>)
UNNAMED_1_CAPN4I_I10_A_4: CN1_4.1(A<0>) D1_4.1(A1) D1_4.10(B1) PX4_4.1(A) RZ1_4.8(B<0>)
UNNAMED_1_CAPN4I_I10_A_5: CN1_5.1(A<0>) D1_5.1(A1) D1_5.10(B1) PX4_5.1(A) RZ1_5.8(B<0>)
UNNAMED_1_CAPN4I_I10_A_6: CN1_6.1(A<0>) D1_6.1(A1) D1_6.10(B1) PX4_6.1(A) RZ1_6.8(B<0>)
UNNAMED_1_CAPN4I_I10_A_7: CN1_7.1(A<0>) D1_7.1(A1) D1_7.10(B1) PX4_7.1(A) RZ1_7.8(B<0>)
UNNAMED_1_CAPN4I_I10_A_8: CN1_8.1(A<0>) D1_8.1(A1) D1_8.10(B1) PX4_8.1(A) RZ1_8.8(B<0>)
UNNAMED_1_CAPN4I_I10_A_9: CN1_9.1(A<0>) D1_9.1(A1) D1_9.10(B1) PX4_9.1(A) RZ1_9.8(B<0>)
UNNAMED_1_CAPN4I_I10_A_10: CN1_10.1(A<0>) D1_10.1(A1) D1_10.10(B1) PX4_10.1(A) RZ1_10.8(B<0>)
UNNAMED_1_CAPN4I_I10_A_11: CN1_11.1(A<0>) D1_11.1(A1) D1_11.10(B1) PX4_11.1(A) RZ1_11.8(B<0>)
UNNAMED_1_CAPN4I_I10_A_12: CN1_12.1(A<0>) D1_12.1(A1) D1_12.10(B1) PX4_12.1(A) RZ1_12.8(B<0>)
UNNAMED_1_CAPN4I_I10_A_13: CN1_13.1(A<0>) D1_13.1(A1) D1_13.10(B1) PX4_13.1(A) RZ1_13.8(B<0>)
UNNAMED_1_CAPN4I_I10_A_14: CN1_14.1(A<0>) D1_14.1(A1) D1_14.10(B1) PX4_14.1(A) RZ1_14.8(B<0>)
UNNAMED_1_CAPN4I_I10_A_15: CN1_15.1(A<0>) D1_15.1(A1) D1_15.10(B1) PX4_15.1(A) RZ1_15.8(B<0>)
UNNAMED_1_CAPN4I_I10_A_16: CN1_16.1(A<0>) D1_16.1(A1) D1_16.10(B1) PX4_16.1(A) RZ1_16.8(B<0>)

Pads without a net: NOREF 1; NOREF#2 1; NOREF#4 1; NOREF#5 1; NOREF#6 1; NOREF#7 1; NOREF#9 1; NOREF#10 1; NOREF#11 1; NOREF#13 1; NOREF#14 1; NOREF#15 1; NOREF#16 1; NOREF#17 1

## Via types
v1: diameter 0.61, hole 0.33, TOP to BOTTOM, 96 vias

## Routing (per net, layer and track width the routed paths; a pad name or vN(x,y) marks a point on that pad's centre or on a via; arc(x,y) is an arc through that point)
GND_SIGNAL: length 134.4
  TOP w0.18: v1(70,120.9) D1_14.8 D1_14.3 v1(70,123.5) ; v1(30,26.5) D1_2.3 D1_2.8 v1(30,29.1) ; v1(110,59.1) D1_6.8 D1_6.3 v1(110,56.5) ; v1(70,16.5) D1_4.3 D1_4.8 v1(70,19.1) ; v1(70,163.5) D1_13.3 D1_13.8 v1(70,160.9) ; v1(110,163.5) D1_11.3 D1_11.8 v1(110,160.9) ; v1(70,59.1) D1_3.8 D1_3.3 v1(70,56.5) ; v1(110,120.9) D1_12.8 D1_12.3 v1(110,123.5) ; v1(26.5,110) D1_15.3 D1_15.8 v1(29.1,110) ; v1(150,150.9) D1_10.8 D1_10.3 v1(150,153.5) ; v1(150,29.1) D1_8.8 D1_8.3 v1(150,26.5) ; v1(29.1,70) D1_1.8 D1_1.3 v1(26.5,70) ; v1(110,19.1) D1_5.8 D1_5.3 v1(110,16.5) ; v1(153.5,110) D1_9.3 D1_9.8 v1(150.9,110) ; v1(153.5,70) D1_7.3 D1_7.8 v1(150.9,70) ; v1(30,153.5) D1_16.3 D1_16.8 v1(30,150.9)
  TOP w0.226: 111.2,166.3 RZ1_11.1 ; 28.8,23.7 RZ1_2.1 ; 156.3,108.8 RZ1_9.1 ; 108.8,13.7 RZ1_5.1 ; 156.3,68.8 RZ1_7.1 ; 23.7,111.2 RZ1_15.1 ; 23.7,71.2 RZ1_1.1 ; 71.2,126.3 RZ1_14.1 ; 111.2,126.3 RZ1_12.1 ; 151.2,156.3 RZ1_10.1 ; 68.8,13.7 RZ1_4.1 ; 148.8,23.7 RZ1_8.1 ; 71.2,166.3 RZ1_13.1 ; 31.2,156.3 RZ1_16.1 ; 68.8,53.7 RZ1_3.1 ; 108.8,53.7 RZ1_6.1
  TOP w0.26: v1(71.2,168.1) 71.2,166.3 ; v1(108.8,51.9) 108.8,53.7 ; RZ1_7.2 v1(157.2,69.6) ; RZ1_9.3 v1(158.1,110.4) ; RZ1_11.4 v1(108.8,167.2) ; RZ1_3.4 v1(71.2,52.8) ; v1(158.1,68.8) 156.3,68.8 ; RZ1_10.3 v1(149.6,158.1) ; RZ1_1.4 v1(22.8,68.8) ; RZ1_14.4 v1(68.8,127.2) ; RZ1_16.3 v1(29.6,158.1) ; RZ1_9.2 v1(157.2,109.6) ; v1(108.8,11.9) 108.8,13.7 ; RZ1_8.3 v1(150.4,21.9) ; RZ1_13.2 v1(70.4,167.2) ; v1(68.8,11.9) 68.8,13.7 ; RZ1_10.4 v1(148.8,157.2) ; RZ1_11.3 v1(109.6,168.1) ; RZ1_2.4 v1(31.2,22.8) ; RZ1_7.4 v1(157.2,71.2) ; v1(31.2,158.1) 31.2,156.3 ; RZ1_6.2 v1(109.6,52.8) ; RZ1_2.2 v1(29.6,22.8) ; RZ1_16.4 v1(28.8,157.2) ; RZ1_8.2 v1(149.6,22.8) ; v1(148.8,21.9) 148.8,23.7 ; v1(68.8,51.9) 68.8,53.7 ; RZ1_12.3 v1(109.6,128.1) ; RZ1_8.4 v1(151.2,22.8) ; RZ1_14.3 v1(69.6,128.1) ; v1(111.2,128.1) 111.2,126.3 ; RZ1_12.2 v1(110.4,127.2) ; RZ1_9.4 v1(157.2,111.2) ; v1(111.2,168.1) 111.2,166.3 ; RZ1_7.3 v1(158.1,70.4) ; RZ1_15.3 v1(21.9,109.6) ; RZ1_6.3 v1(110.4,51.9) ; RZ1_12.4 v1(108.8,127.2) ; v1(21.9,111.2) 23.7,111.2 ; RZ1_5.3 v1(110.4,11.9) ; RZ1_16.2 v1(30.4,157.2) ; v1(21.9,71.2) 23.7,71.2 ; RZ1_14.2 v1(70.4,127.2) ; v1(151.2,158.1) 151.2,156.3 ; RZ1_13.3 v1(69.6,168.1) ; RZ1_1.3 v1(21.9,69.6) ; RZ1_4.4 v1(71.2,12.8) ; RZ1_4.2 v1(69.6,12.8) ; v1(28.8,21.9) 28.8,23.7 ; RZ1_15.4 v1(22.8,108.8) ; RZ1_5.2 v1(109.6,12.8) ; RZ1_3.3 v1(70.4,51.9) ; RZ1_2.3 v1(30.4,21.9) ; RZ1_4.3 v1(70.4,11.9) ; RZ1_5.4 v1(111.2,12.8) ; v1(158.1,108.8) 156.3,108.8 ; RZ1_15.2 v1(22.8,110.4) ; RZ1_11.2 v1(110.4,167.2) ; RZ1_10.2 v1(150.4,157.2) ; v1(71.2,128.1) 71.2,126.3 ; RZ1_6.4 v1(111.2,52.8) ; RZ1_13.4 v1(68.8,167.2) ; RZ1_3.2 v1(69.6,52.8) ; RZ1_1.2 v1(22.8,70.4)
ANALOG_TO_MAROC<0>: length 2.7
  TOP w0.26: CN1_7.8 147.9,71.6 146.6,72.9
  TOP w0.4: 146.1,72.9 146.6,72.9
ANALOG_TO_MAROC<1>: length 2.8
  TOP w0.26: CN1_9.2 147.9,108.3 146.8,107.2
  TOP w0.4: 146.1,107.2 146.8,107.2
ANALOG_TO_MAROC<2>: length 2.1
  TOP w0.26: 146.8,71.2 147.6,70.4 CN1_7.6
  TOP w0.4: 146.1,71.2 146.8,71.2
ANALOG_TO_MAROC<3>: length 2.1
  TOP w0.26: CN1_9.4 147.6,109.6 146.8,108.8
  TOP w0.4: 146.1,108.8 146.8,108.8
ANALOG_TO_MAROC<4>: length 2.1
  TOP w0.26: CN1_7.4 147.6,69.6 146.8,68.8
  TOP w0.4: 146.1,68.8 146.8,68.8
ANALOG_TO_MAROC<5>: length 2.1
  TOP w0.26: 146.8,111.2 147.6,110.4 CN1_9.6
  TOP w0.4: 146.1,111.2 146.8,111.2
ANALOG_TO_MAROC<6>: length 2.8
  TOP w0.26: CN1_7.2 147.9,68.3 146.8,67.2
  TOP w0.4: 146.1,67.2 146.8,67.2
ANALOG_TO_MAROC<7>: length 2.7
  TOP w0.26: CN1_9.8 147.9,111.6 146.6,112.9
  TOP w0.4: 146.1,112.9 146.6,112.9
ANALOG_TO_MAROC<8>: length 2.7
  TOP w0.26: CN1_8.8 151.6,32.1 152.9,33.4
  TOP w0.4: 152.9,33.9 152.9,33.4
ANALOG_TO_MAROC<9>: length 2.8
  TOP w0.26: CN1_10.2 151.7,147.9 152.8,146.8
  TOP w0.4: 152.8,146.1 152.8,146.8
ANALOG_TO_MAROC<10>: length 2.1
  TOP w0.26: CN1_8.6 150.4,32.4 151.2,33.2
  TOP w0.4: 151.2,33.9 151.2,33.2
ANALOG_TO_MAROC<11>: length 2.1
  TOP w0.26: CN1_10.4 150.4,147.6 151.2,146.8
  TOP w0.4: 151.2,146.1 151.2,146.8
ANALOG_TO_MAROC<12>: length 2.1
  TOP w0.26: 148.8,33.2 149.6,32.4 CN1_8.4
  TOP w0.4: 148.8,33.9 148.8,33.2
ANALOG_TO_MAROC<13>: length 2.1
  TOP w0.26: 148.8,146.8 149.6,147.6 CN1_10.6
  TOP w0.4: 148.8,146.1 148.8,146.8
ANALOG_TO_MAROC<14>: length 2.8
  TOP w0.26: 147.2,33.2 148.3,32.1 CN1_8.2
  TOP w0.4: 147.2,33.9 147.2,33.2
ANALOG_TO_MAROC<15>: length 2.7
  TOP w0.26: 147.1,146.6 148.4,147.9 CN1_10.8
  TOP w0.4: 147.1,146.1 147.1,146.6
ANALOG_TO_MAROC<16>: length 2.7
  TOP w0.26: 112.9,63.4 111.6,62.1 CN1_6.8
  TOP w0.4: 112.9,63.9 112.9,63.4
ANALOG_TO_MAROC<17>: length 2.8
  TOP w0.26: CN1_12.2 111.7,117.9 112.8,116.8
  TOP w0.4: 112.8,116.1 112.8,116.8
ANALOG_TO_MAROC<18>: length 2.1
  TOP w0.26: 111.2,63.2 110.4,62.4 CN1_6.6
  TOP w0.4: 111.2,63.9 111.2,63.2
ANALOG_TO_MAROC<19>: length 2.1
  TOP w0.26: CN1_12.4 110.4,117.6 111.2,116.8
  TOP w0.4: 111.2,116.1 111.2,116.8
ANALOG_TO_MAROC<20>: length 2.1
  TOP w0.26: CN1_6.4 109.6,62.4 108.8,63.2
  TOP w0.4: 108.8,63.9 108.8,63.2
ANALOG_TO_MAROC<21>: length 2.1
  TOP w0.26: 108.8,116.8 109.6,117.6 CN1_12.6
  TOP w0.4: 108.8,116.1 108.8,116.8
ANALOG_TO_MAROC<22>: length 2.8
  TOP w0.26: CN1_6.2 108.3,62.1 107.2,63.2
  TOP w0.4: 107.2,63.9 107.2,63.2
ANALOG_TO_MAROC<23>: length 2.7
  TOP w0.26: 107.1,116.6 108.4,117.9 CN1_12.8
  TOP w0.4: 107.1,116.1 107.1,116.6
ANALOG_TO_MAROC<24>: length 2.7
  TOP w0.26: CN1_5.8 111.6,22.1 112.9,23.4
  TOP w0.4: 112.9,23.9 112.9,23.4
ANALOG_TO_MAROC<25>: length 2.8
  TOP w0.26: 112.8,156.8 111.7,157.9 CN1_11.2
  TOP w0.4: 112.8,156.1 112.8,156.8
ANALOG_TO_MAROC<26>: length 2.1
  TOP w0.26: CN1_5.6 110.4,22.4 111.2,23.2
  TOP w0.4: 111.2,23.9 111.2,23.2
ANALOG_TO_MAROC<27>: length 2.1
  TOP w0.26: CN1_11.4 110.4,157.6 111.2,156.8
  TOP w0.4: 111.2,156.1 111.2,156.8
ANALOG_TO_MAROC<28>: length 2.1
  TOP w0.26: 108.8,23.2 109.6,22.4 CN1_5.4
  TOP w0.4: 108.8,23.9 108.8,23.2
ANALOG_TO_MAROC<29>: length 2.1
  TOP w0.26: CN1_11.6 109.6,157.6 108.8,156.8
  TOP w0.4: 108.8,156.1 108.8,156.8
ANALOG_TO_MAROC<30>: length 2.8
  TOP w0.26: 107.2,23.2 108.3,22.1 CN1_5.2
  TOP w0.4: 107.2,23.9 107.2,23.2
ANALOG_TO_MAROC<31>: length 2.7
  TOP w0.26: 107.1,156.6 108.4,157.9 CN1_11.8
  TOP w0.4: 107.1,156.1 107.1,156.6
ANALOG_TO_MAROC<32>: length 2.7
  TOP w0.26: 72.9,23.4 71.6,22.1 CN1_4.8
  TOP w0.4: 72.9,23.9 72.9,23.4
ANALOG_TO_MAROC<33>: length 2.8
  TOP w0.26: CN1_13.2 71.7,157.9 72.8,156.8
  TOP w0.4: 72.8,156.1 72.8,156.8
ANALOG_TO_MAROC<34>: length 2.1
  TOP w0.26: 71.2,23.2 70.4,22.4 CN1_4.6
  TOP w0.4: 71.2,23.9 71.2,23.2
ANALOG_TO_MAROC<35>: length 2.1
  TOP w0.26: CN1_13.4 70.4,157.6 71.2,156.8
  TOP w0.4: 71.2,156.1 71.2,156.8
ANALOG_TO_MAROC<36>: length 2.1
  TOP w0.26: CN1_4.4 69.6,22.4 68.8,23.2
  TOP w0.4: 68.8,23.9 68.8,23.2
ANALOG_TO_MAROC<37>: length 2.1
  TOP w0.26: 68.8,156.8 69.6,157.6 CN1_13.6
  TOP w0.4: 68.8,156.1 68.8,156.8
ANALOG_TO_MAROC<38>: length 2.8
  TOP w0.26: CN1_4.2 68.3,22.1 67.2,23.2
  TOP w0.4: 67.2,23.9 67.2,23.2
ANALOG_TO_MAROC<39>: length 2.7
  TOP w0.26: CN1_13.8 68.4,157.9 67.1,156.6
  TOP w0.4: 67.1,156.1 67.1,156.6
ANALOG_TO_MAROC<40>: length 2.7
  TOP w0.26: 72.9,63.4 71.6,62.1 CN1_3.8
  TOP w0.4: 72.9,63.9 72.9,63.4
ANALOG_TO_MAROC<41>: length 2.8
  TOP w0.26: CN1_14.2 71.7,117.9 72.8,116.8
  TOP w0.4: 72.8,116.1 72.8,116.8
ANALOG_TO_MAROC<42>: length 2.1
  TOP w0.26: CN1_3.6 70.4,62.4 71.2,63.2
  TOP w0.4: 71.2,63.9 71.2,63.2
ANALOG_TO_MAROC<43>: length 2.1
  TOP w0.26: 71.2,116.8 70.4,117.6 CN1_14.4
  TOP w0.4: 71.2,116.1 71.2,116.8
ANALOG_TO_MAROC<44>: length 2.1
  TOP w0.26: CN1_3.4 69.6,62.4 68.8,63.2
  TOP w0.4: 68.8,63.9 68.8,63.2
ANALOG_TO_MAROC<45>: length 2.1
  TOP w0.26: CN1_14.6 69.6,117.6 68.8,116.8
  TOP w0.4: 68.8,116.1 68.8,116.8
ANALOG_TO_MAROC<46>: length 2.8
  TOP w0.26: 67.2,63.2 68.3,62.1 CN1_3.2
  TOP w0.4: 67.2,63.9 67.2,63.2
ANALOG_TO_MAROC<47>: length 2.7
  TOP w0.26: 67.1,116.6 68.4,117.9 CN1_14.8
  TOP w0.4: 67.1,116.1 67.1,116.6
ANALOG_TO_MAROC<48>: length 2.7
  TOP w0.26: 32.9,33.4 31.6,32.1 CN1_2.8
  TOP w0.4: 32.9,33.9 32.9,33.4
ANALOG_TO_MAROC<49>: length 2.8
  TOP w0.26: CN1_16.2 31.7,147.9 32.8,146.8
  TOP w0.4: 32.8,146.1 32.8,146.8
ANALOG_TO_MAROC<50>: length 2.1
  TOP w0.26: 31.2,33.2 30.4,32.4 CN1_2.6
  TOP w0.4: 31.2,33.9 31.2,33.2
ANALOG_TO_MAROC<51>: length 2.1
  TOP w0.26: 31.2,146.8 30.4,147.6 CN1_16.4
  TOP w0.4: 31.2,146.1 31.2,146.8
ANALOG_TO_MAROC<52>: length 2.1
  TOP w0.26: CN1_2.4 29.6,32.4 28.8,33.2
  TOP w0.4: 28.8,33.9 28.8,33.2
ANALOG_TO_MAROC<53>: length 2.1
  TOP w0.26: 28.8,146.8 29.6,147.6 CN1_16.6
  TOP w0.4: 28.8,146.1 28.8,146.8
ANALOG_TO_MAROC<54>: length 2.8
  TOP w0.26: CN1_2.2 28.3,32.1 27.2,33.2
  TOP w0.4: 27.2,33.9 27.2,33.2
ANALOG_TO_MAROC<55>: length 2.7
  TOP w0.26: CN1_16.8 28.4,147.9 27.1,146.6
  TOP w0.4: 27.1,146.1 27.1,146.6
ANALOG_TO_MAROC<56>: length 2.7
  TOP w0.26: 33.4,67.1 32.1,68.4 CN1_1.8
  TOP w0.4: 33.9,67.1 33.4,67.1
ANALOG_TO_MAROC<57>: length 2.8
  TOP w0.26: CN1_15.2 32.1,111.7 33.2,112.8
  TOP w0.4: 33.9,112.8 33.2,112.8
ANALOG_TO_MAROC<58>: length 2.1
  TOP w0.26: CN1_1.6 32.4,69.6 33.2,68.8
  TOP w0.4: 33.9,68.8 33.2,68.8
ANALOG_TO_MAROC<59>: length 2.1
  TOP w0.26: CN1_15.4 32.4,110.4 33.2,111.2
  TOP w0.4: 33.9,111.2 33.2,111.2
ANALOG_TO_MAROC<60>: length 2.1
  TOP w0.26: CN1_1.4 32.4,70.4 33.2,71.2
  TOP w0.4: 33.9,71.2 33.2,71.2
ANALOG_TO_MAROC<61>: length 2.1
  TOP w0.26: CN1_15.6 32.4,109.6 33.2,108.8
  TOP w0.4: 33.9,108.8 33.2,108.8
ANALOG_TO_MAROC<62>: length 2.8
  TOP w0.26: 33.2,72.8 32.1,71.7 CN1_1.2
  TOP w0.4: 33.9,72.8 33.2,72.8
ANALOG_TO_MAROC<63>: length 2.7
  TOP w0.26: CN1_15.8 32.1,108.4 33.4,107.1
  TOP w0.4: 33.9,107.1 33.4,107.1
UNNAMED_1_CAPN4I_I10_A_1: length 23.5
  TOP w0.18: 25.31,71.2 26.76,71.2 26.96,71 D1_1.1 D1_1.10 28.49,71 28.74,71.25 29.31,71.25 29.36,71.2 CN1_1.1
  TOP w0.226: 39.99,80.01 PX4_1.1
  TOP w0.26: 26.4,71.2 26.4,73
  TOP w0.4: 26.4,73 33.41,80.01 39.99,80.01
UNNAMED_1_CAPN4I_I10_A_1_1: length 17.4
  TOP w0.18: 24.5,72.1 24.5,70.58 24.68,70.4 25.93,70.4 26.12,70.59 26.75,70.59 26.84,70.5 D1_1.2 D1_1.9 28.76,70.5 28.85,70.59 29.35,70.59 29.54,70.4 CN1_1.3
  TOP w0.4: 24.5,72.1 19.99,76.61 PX3_1.1 19.99,80.01
UNNAMED_1_CAPN4I_I10_A_1_2: length 17.4
  TOP w0.18: 27.9,24.5 29.42,24.5 29.6,24.68 29.6,25.93 29.41,26.12 29.41,26.75 29.5,26.84 D1_2.2 D1_2.9 29.5,28.76 29.41,28.85 29.41,29.35 29.6,29.54 CN1_2.3
  TOP w0.4: 27.9,24.5 23.39,19.99 PX3_2.1 19.99,19.99
UNNAMED_1_CAPN4I_I10_A_1_3: length 17.4
  TOP w0.18: CN1_3.3 69.6,59.54 69.41,59.35 69.41,58.85 69.5,58.76 D1_3.9 D1_3.2 69.5,56.84 69.41,56.75 69.41,56.12 69.6,55.93 RZ1_3.7 69.6,54.68 69.42,54.5 67.9,54.5
  TOP w0.4: 59.99,49.99 PX3_3.1 63.39,49.99 67.9,54.5
UNNAMED_1_CAPN4I_I10_A_1_4: length 17.4
  TOP w0.18: 67.9,14.5 69.42,14.5 69.6,14.68 RZ1_4.7 69.6,15.93 69.41,16.12 69.41,16.75 69.5,16.84 D1_4.2 D1_4.9 69.5,18.76 69.41,18.85 69.41,19.35 69.6,19.54 CN1_4.3
  TOP w0.4: 59.99,9.99 PX3_4.1 63.39,9.99 67.9,14.5
UNNAMED_1_CAPN4I_I10_A_1_5: length 17.4
  TOP w0.18: 107.9,14.5 109.42,14.5 109.6,14.68 RZ1_5.7 109.6,15.93 109.41,16.12 109.41,16.75 109.5,16.84 D1_5.2 D1_5.9 109.5,18.76 109.41,18.85 109.41,19.35 109.6,19.54 CN1_5.3
  TOP w0.4: 99.99,9.99 PX3_5.1 103.39,9.99 107.9,14.5
UNNAMED_1_CAPN4I_I10_A_1_6: length 17.4
  TOP w0.18: 107.9,54.5 109.42,54.5 109.6,54.68 RZ1_6.7 109.6,55.93 109.41,56.12 109.41,56.75 109.5,56.84 D1_6.2 D1_6.9 109.5,58.76 109.41,58.85 109.41,59.35 109.6,59.54 CN1_6.3
  TOP w0.4: 99.99,49.99 PX3_6.1 103.39,49.99 107.9,54.5
UNNAMED_1_CAPN4I_I10_A_1_7: length 17.4
  TOP w0.18: CN1_7.3 150.46,69.6 150.65,69.41 151.15,69.41 151.24,69.5 D1_7.9 D1_7.2 153.16,69.5 153.25,69.41 153.88,69.41 154.07,69.6 155.32,69.6 155.5,69.42 155.5,67.9
  TOP w0.4: 160.01,59.99 PX3_7.1 160.01,63.39 155.5,67.9
UNNAMED_1_CAPN4I_I10_A_1_8: length 17.4
  TOP w0.18: 147.9,24.5 149.42,24.5 149.6,24.68 149.6,25.93 149.41,26.12 149.41,26.75 149.5,26.84 D1_8.2 D1_8.9 149.5,28.76 149.41,28.85 149.41,29.35 149.6,29.54 CN1_8.3
  TOP w0.4: 139.99,19.99 PX3_8.1 143.39,19.99 147.9,24.5
UNNAMED_1_CAPN4I_I10_A_1_9: length 17.4
  TOP w0.18: 155.5,107.9 155.5,109.42 155.32,109.6 154.07,109.6 153.88,109.41 153.25,109.41 153.16,109.5 D1_9.2 D1_9.9 151.24,109.5 151.15,109.41 150.65,109.41 150.46,109.6 CN1_9.3
  TOP w0.4: 160.01,99.99 PX3_9.1 160.01,103.39 155.5,107.9
UNNAMED_1_CAPN4I_I10_A_1_10: length 17.4
  TOP w0.18: 152.1,155.5 150.58,155.5 150.4,155.32 150.4,154.07 150.59,153.88 150.59,153.25 150.5,153.16 D1_10.2 D1_10.9 150.5,151.24 150.59,151.15 150.59,150.65 150.4,150.46 CN1_10.3
  TOP w0.4: 152.1,155.5 156.61,160.01 PX3_10.1 160.01,160.01
UNNAMED_1_CAPN4I_I10_A_1_11: length 17.4
  TOP w0.18: 112.1,165.5 110.58,165.5 110.4,165.32 RZ1_11.7 110.4,164.07 110.59,163.88 110.59,163.25 110.5,163.16 D1_11.2 D1_11.9 110.5,161.24 110.59,161.15 110.59,160.65 110.4,160.46 CN1_11.3
  TOP w0.4: 120.01,170.01 PX3_11.1 116.61,170.01 112.1,165.5
UNNAMED_1_CAPN4I_I10_A_1_12: length 17.4
  TOP w0.18: 112.1,125.5 110.58,125.5 110.4,125.32 RZ1_12.7 110.4,124.07 110.59,123.88 110.59,123.25 110.5,123.16 D1_12.2 D1_12.9 110.5,121.24 110.59,121.15 110.59,120.65 110.4,120.46 CN1_12.3
  TOP w0.4: 112.1,125.5 116.61,130.01 PX3_12.1 120.01,130.01
UNNAMED_1_CAPN4I_I10_A_1_13: length 17.4
  TOP w0.18: 72.1,165.5 70.58,165.5 70.4,165.32 RZ1_13.7 70.4,164.07 70.59,163.88 70.59,163.25 70.5,163.16 D1_13.2 D1_13.9 70.5,161.24 70.59,161.15 70.59,160.65 70.4,160.46 CN1_13.3
  TOP w0.4: 80.01,170.01 PX3_13.1 76.61,170.01 72.1,165.5
UNNAMED_1_CAPN4I_I10_A_1_14: length 17.4
  TOP w0.18: 72.1,125.5 70.58,125.5 70.4,125.32 RZ1_14.7 70.4,124.07 70.59,123.88 70.59,123.25 70.5,123.16 D1_14.2 D1_14.9 70.5,121.24 70.59,121.15 70.59,120.65 70.4,120.46 CN1_14.3
  TOP w0.4: 80.01,130.01 PX3_14.1 76.61,130.01 72.1,125.5
UNNAMED_1_CAPN4I_I10_A_1_15: length 17.4
  TOP w0.18: CN1_15.3 29.54,110.4 29.35,110.59 28.85,110.59 28.76,110.5 D1_15.9 D1_15.2 26.84,110.5 26.75,110.59 26.12,110.59 25.93,110.4 24.68,110.4 24.5,110.58 24.5,112.1
  TOP w0.4: 19.99,120.01 PX3_15.1 19.99,116.61 24.5,112.1
UNNAMED_1_CAPN4I_I10_A_1_16: length 17.4
  TOP w0.18: CN1_16.3 30.4,150.46 30.59,150.65 30.59,151.15 30.5,151.24 D1_16.9 D1_16.2 30.5,153.16 30.59,153.25 30.59,153.88 30.4,154.07 30.4,155.32 30.58,155.5 32.1,155.5
  TOP w0.4: 32.1,155.5 36.61,160.01 PX3_16.1 40.01,160.01
UNNAMED_1_CAPN4I_I10_A_2: length 23.5
  TOP w0.18: CN1_2.1 28.8,29.36 28.75,29.31 28.75,28.74 29,28.49 D1_2.10 D1_2.1 29,26.96 28.8,26.76 28.8,25.31
  TOP w0.226: 19.99,39.99 PX4_2.1
  TOP w0.26: 28.8,26.4 27,26.4
  TOP w0.4: 19.99,39.99 19.99,33.41 27,26.4
UNNAMED_1_CAPN4I_I10_A_2_1: length 17.4
  TOP w0.18: 24.5,67.9 24.5,69.42 24.68,69.6 25.93,69.6 26.12,69.41 26.69,69.41 26.72,69.44 26.78,69.44 26.84,69.5 D1_1.4 D1_1.7 28.76,69.5 28.85,69.41 29.35,69.41 29.54,69.6 CN1_1.5
  TOP w0.226: 19.99,60.93 PX2_1.1
  TOP w0.4: 19.99,60.93 19.99,63.39 24.5,67.9
UNNAMED_1_CAPN4I_I10_A_2_2: length 17.4
  TOP w0.18: CN1_2.5 30.4,29.54 30.59,29.35 30.59,28.85 30.5,28.76 D1_2.7 D1_2.4 30.5,26.84 30.56,26.78 30.56,26.72 30.59,26.69 30.59,26.12 30.4,25.93 30.4,24.68 30.58,24.5 32.1,24.5
  TOP w0.226: 39.07,19.99 PX2_2.1
  TOP w0.4: 39.07,19.99 36.61,19.99 32.1,24.5
UNNAMED_1_CAPN4I_I10_A_2_3: length 17.4
  TOP w0.18: 72.1,54.5 70.58,54.5 70.4,54.68 RZ1_3.6 70.4,55.93 70.59,56.12 70.59,56.69 70.56,56.72 70.56,56.78 70.5,56.84 D1_3.4 D1_3.7 70.5,58.76 70.59,58.85 70.59,59.35 70.4,59.54 CN1_3.5
  TOP w0.226: 79.07,49.99 PX2_3.1
  TOP w0.4: 79.07,49.99 76.61,49.99 72.1,54.5
UNNAMED_1_CAPN4I_I10_A_2_4: length 17.4
  TOP w0.18: CN1_4.5 70.4,19.54 70.59,19.35 70.59,18.85 70.5,18.76 D1_4.7 D1_4.4 70.5,16.84 70.56,16.78 70.56,16.72 70.59,16.69 70.59,16.12 70.4,15.93 RZ1_4.6 70.4,14.68 70.58,14.5 72.1,14.5
  TOP w0.226: 79.07,9.99 PX2_4.1
  TOP w0.4: 72.1,14.5 76.61,9.99 79.07,9.99
UNNAMED_1_CAPN4I_I10_A_2_5: length 17.4
  TOP w0.18: CN1_5.5 110.4,19.54 110.59,19.35 110.59,18.85 110.5,18.76 D1_5.7 D1_5.4 110.5,16.84 110.56,16.78 110.56,16.72 110.59,16.69 110.59,16.12 110.4,15.93 RZ1_5.6 110.4,14.68 110.58,14.5 112.1,14.5
  TOP w0.226: 119.07,9.99 PX2_5.1
  TOP w0.4: 119.07,9.99 116.61,9.99 112.1,14.5
UNNAMED_1_CAPN4I_I10_A_2_6: length 17.4
  TOP w0.18: CN1_6.5 110.4,59.54 110.59,59.35 110.59,58.85 110.5,58.76 D1_6.7 D1_6.4 110.5,56.84 110.56,56.78 110.56,56.72 110.59,56.69 110.59,56.12 110.4,55.93 RZ1_6.6 110.4,54.68 110.58,54.5 112.1,54.5
  TOP w0.226: 119.07,49.99 PX2_6.1
  TOP w0.4: 119.07,49.99 116.61,49.99 112.1,54.5
UNNAMED_1_CAPN4I_I10_A_2_7: length 17.4
  TOP w0.18: CN1_7.5 150.46,70.4 150.65,70.59 151.15,70.59 151.24,70.5 D1_7.7 D1_7.4 153.16,70.5 153.22,70.56 153.28,70.56 153.31,70.59 153.88,70.59 154.07,70.4 155.32,70.4 155.5,70.58 155.5,72.1
  TOP w0.226: 160.01,79.07 PX2_7.1
  TOP w0.4: 155.5,72.1 160.01,76.61 160.01,79.07
UNNAMED_1_CAPN4I_I10_A_2_8: length 17.4
  TOP w0.18: CN1_8.5 150.4,29.54 150.59,29.35 150.59,28.85 150.5,28.76 D1_8.7 D1_8.4 150.5,26.84 150.56,26.78 150.56,26.72 150.59,26.69 150.59,26.12 150.4,25.93 150.4,24.68 150.58,24.5 152.1,24.5
  TOP w0.226: 159.07,19.99 PX2_8.1
  TOP w0.4: 159.07,19.99 156.61,19.99 152.1,24.5
UNNAMED_1_CAPN4I_I10_A_2_9: length 17.4
  TOP w0.18: 155.5,112.1 155.5,110.58 155.32,110.4 154.07,110.4 153.88,110.59 153.31,110.59 153.28,110.56 153.22,110.56 153.16,110.5 D1_9.4 D1_9.7 151.24,110.5 151.15,110.59 150.65,110.59 150.46,110.4 CN1_9.5
  TOP w0.226: 160.01,119.07 PX2_9.1
  TOP w0.4: 155.5,112.1 160.01,116.61 160.01,119.07
UNNAMED_1_CAPN4I_I10_A_2_10: length 17.4
  TOP w0.18: CN1_10.5 149.6,150.46 149.41,150.65 149.41,151.15 149.5,151.24 D1_10.7 D1_10.4 149.5,153.16 149.44,153.22 149.44,153.28 149.41,153.31 149.41,153.88 149.6,154.07 149.6,155.32 149.42,155.5 147.9,155.5
  TOP w0.226: 140.93,160.01 PX2_10.1
  TOP w0.4: 147.9,155.5 143.39,160.01 140.93,160.01
UNNAMED_1_CAPN4I_I10_A_2_11: length 17.4
  TOP w0.18: 107.9,165.5 109.42,165.5 109.6,165.32 RZ1_11.6 109.6,164.07 109.41,163.88 109.41,163.31 109.44,163.28 109.44,163.22 109.5,163.16 D1_11.4 D1_11.7 109.5,161.24 109.41,161.15 109.41,160.65 109.6,160.46 CN1_11.5
  TOP w0.226: 100.93,170.01 PX2_11.1
  TOP w0.4: 107.9,165.5 103.39,170.01 100.93,170.01
UNNAMED_1_CAPN4I_I10_A_2_12: length 17.4
  TOP w0.18: CN1_12.5 109.6,120.46 109.41,120.65 109.41,121.15 109.5,121.24 D1_12.7 D1_12.4 109.5,123.16 109.44,123.22 109.44,123.28 109.41,123.31 109.41,123.88 109.6,124.07 RZ1_12.6 109.6,125.32 109.42,125.5 107.9,125.5
  TOP w0.226: 100.93,130.01 PX2_12.1
  TOP w0.4: 107.9,125.5 103.39,130.01 100.93,130.01
UNNAMED_1_CAPN4I_I10_A_2_13: length 17.4
  TOP w0.18: CN1_13.5 69.6,160.46 69.41,160.65 69.41,161.15 69.5,161.24 D1_13.7 D1_13.4 69.5,163.16 69.44,163.22 69.44,163.28 69.41,163.31 69.41,163.88 69.6,164.07 RZ1_13.6 69.6,165.32 69.42,165.5 67.9,165.5
  TOP w0.226: 60.93,170.01 PX2_13.1
  TOP w0.4: 67.9,165.5 63.39,170.01 60.93,170.01
UNNAMED_1_CAPN4I_I10_A_2_14: length 17.4
  TOP w0.18: CN1_14.5 69.6,120.46 69.41,120.65 69.41,121.15 69.5,121.24 D1_14.7 D1_14.4 69.5,123.16 69.44,123.22 69.44,123.28 69.41,123.31 69.41,123.88 69.6,124.07 RZ1_14.6 69.6,125.32 69.42,125.5 67.9,125.5
  TOP w0.226: 60.93,130.01 PX2_14.1
  TOP w0.4: 60.93,130.01 63.39,130.01 67.9,125.5
UNNAMED_1_CAPN4I_I10_A_2_15: length 17.4
  TOP w0.18: CN1_15.5 29.54,109.6 29.35,109.41 28.85,109.41 28.76,109.5 D1_15.7 D1_15.4 26.84,109.5 26.78,109.44 26.72,109.44 26.69,109.41 26.12,109.41 25.93,109.6 24.68,109.6 24.5,109.42 24.5,107.9
  TOP w0.226: 19.99,100.93 PX2_15.1
  TOP w0.4: 19.99,100.93 19.99,103.39 24.5,107.9
UNNAMED_1_CAPN4I_I10_A_2_16: length 17.4
  TOP w0.18: CN1_16.5 29.6,150.46 29.41,150.65 29.41,151.15 29.5,151.24 D1_16.7 D1_16.4 29.5,153.16 29.44,153.22 29.44,153.28 29.41,153.31 29.41,153.88 29.6,154.07 29.6,155.32 29.42,155.5 27.9,155.5
  TOP w0.226: 20.93,160.01 PX2_16.1
  TOP w0.4: 27.9,155.5 23.39,160.01 20.93,160.01
UNNAMED_1_CAPN4I_I10_A_3: length 23.5
  TOP w0.18: RZ1_3.8 68.8,56.76 69,56.96 D1_3.1 D1_3.10 69,58.49 68.75,58.74 68.75,59.31 68.8,59.36 CN1_3.1
  TOP w0.226: 59.99,69.99 PX4_3.1
  TOP w0.26: 68.8,56.4 67,56.4
  TOP w0.4: 59.99,69.99 59.99,63.41 67,56.4
UNNAMED_1_CAPN4I_I10_A_3_1: length 23.6
  TOP w0.18: 25.31,68.8 26.67,68.8 26.86,68.99 26.89,68.99 26.9,69 D1_1.5 D1_1.6 28.49,69 28.74,68.75 29.31,68.75 29.36,68.8 CN1_1.7
  TOP w0.226: 39.99,60.01 PX1_1.1
  TOP w0.26: 26.4,68.8 26.4,66.8
  TOP w0.4: 26.4,66.8 33.19,60.01 39.99,60.01
UNNAMED_1_CAPN4I_I10_A_3_2: length 23.6
  TOP w0.18: CN1_2.7 31.2,29.36 31.25,29.31 31.25,28.74 31,28.49 D1_2.6 D1_2.5 31,26.9 31.01,26.89 31.01,26.86 31.2,26.67 31.2,25.31
  TOP w0.226: 39.99,39.99 PX1_2.1
  TOP w0.26: 31.2,26.4 33.2,26.4
  TOP w0.4: 39.99,39.99 39.99,33.19 33.2,26.4
UNNAMED_1_CAPN4I_I10_A_3_3: length 23.6
  TOP w0.18: RZ1_3.5 71.2,56.67 71.01,56.86 71.01,56.89 71,56.9 D1_3.5 D1_3.6 71,58.49 71.25,58.74 71.25,59.31 71.2,59.36 CN1_3.7
  TOP w0.226: 79.99,69.99 PX1_3.1
  TOP w0.26: 71.2,56.4 73.2,56.4
  TOP w0.4: 79.99,69.99 79.99,63.19 73.2,56.4
UNNAMED_1_CAPN4I_I10_A_3_4: length 23.6
  TOP w0.18: CN1_4.7 71.2,19.36 71.25,19.31 71.25,18.74 71,18.49 D1_4.6 D1_4.5 71,16.9 71.01,16.89 71.01,16.86 71.2,16.67 RZ1_4.5
  TOP w0.226: 79.99,29.99 PX1_4.1
  TOP w0.26: 71.2,16.4 73.2,16.4
  TOP w0.4: 79.99,29.99 79.99,23.19 73.2,16.4
UNNAMED_1_CAPN4I_I10_A_3_5: length 23.6
  TOP w0.18: CN1_5.7 111.2,19.36 111.25,19.31 111.25,18.74 111,18.49 D1_5.6 D1_5.5 111,16.9 111.01,16.89 111.01,16.86 111.2,16.67 RZ1_5.5
  TOP w0.226: 119.99,29.99 PX1_5.1
  TOP w0.26: 111.2,16.4 113.2,16.4
  TOP w0.4: 113.2,16.4 119.99,23.19 119.99,29.99
UNNAMED_1_CAPN4I_I10_A_3_6: length 23.6
  TOP w0.18: RZ1_6.5 111.2,56.67 111.01,56.86 111.01,56.89 111,56.9 D1_6.5 D1_6.6 111,58.49 111.25,58.74 111.25,59.31 111.2,59.36 CN1_6.7
  TOP w0.226: 119.99,69.99 PX1_6.1
  TOP w0.26: 111.2,56.4 113.2,56.4
  TOP w0.4: 119.99,69.99 119.99,63.19 113.2,56.4
UNNAMED_1_CAPN4I_I10_A_3_7: length 23.6
  TOP w0.18: 154.69,71.2 153.33,71.2 153.14,71.01 153.11,71.01 153.1,71 D1_7.5 D1_7.6 151.51,71 151.26,71.25 150.69,71.25 150.64,71.2 CN1_7.7
  TOP w0.226: 140.01,79.99 PX1_7.1
  TOP w0.26: 153.6,71.2 153.6,73.2
  TOP w0.4: 153.6,73.2 146.81,79.99 140.01,79.99
UNNAMED_1_CAPN4I_I10_A_3_8: length 23.6
  TOP w0.18: CN1_8.7 151.2,29.36 151.25,29.31 151.25,28.74 151,28.49 D1_8.6 D1_8.5 151,26.9 151.01,26.89 151.01,26.86 151.2,26.67 151.2,25.31
  TOP w0.226: 159.99,39.99 PX1_8.1
  TOP w0.26: 151.2,26.4 153.2,26.4
  TOP w0.4: 159.99,39.99 159.99,33.19 153.2,26.4
UNNAMED_1_CAPN4I_I10_A_3_9: length 23.6
  TOP w0.18: 154.69,111.2 153.33,111.2 153.14,111.01 153.11,111.01 153.1,111 D1_9.5 D1_9.6 151.51,111 151.26,111.25 150.69,111.25 150.64,111.2 CN1_9.7
  TOP w0.226: 140.01,119.99 PX1_9.1
  TOP w0.26: 153.6,111.2 153.6,113.2
  TOP w0.4: 153.6,113.2 146.81,119.99 140.01,119.99
UNNAMED_1_CAPN4I_I10_A_3_10: length 23.6
  TOP w0.18: CN1_10.7 148.8,150.64 148.75,150.69 148.75,151.26 149,151.51 D1_10.6 D1_10.5 149,153.1 148.99,153.11 148.99,153.14 148.8,153.33 148.8,154.69
  TOP w0.226: 140.01,140.01 PX1_10.1
  TOP w0.26: 148.8,153.6 146.8,153.6
  TOP w0.4: 140.01,140.01 140.01,146.81 146.8,153.6
